# Altium PCB BMS.PcbDoc (part 1 of 3)
Units mm, origin at the board's own origin, x right, y up, seen from the top; angles counter-clockwise.
Board outline 84 x 70 mm, 4 copper layers (PWR, GND1, GND2, SIG), stack 1.586 mm thick; 200 components, 151 nets, 637 pads, 135 vias.
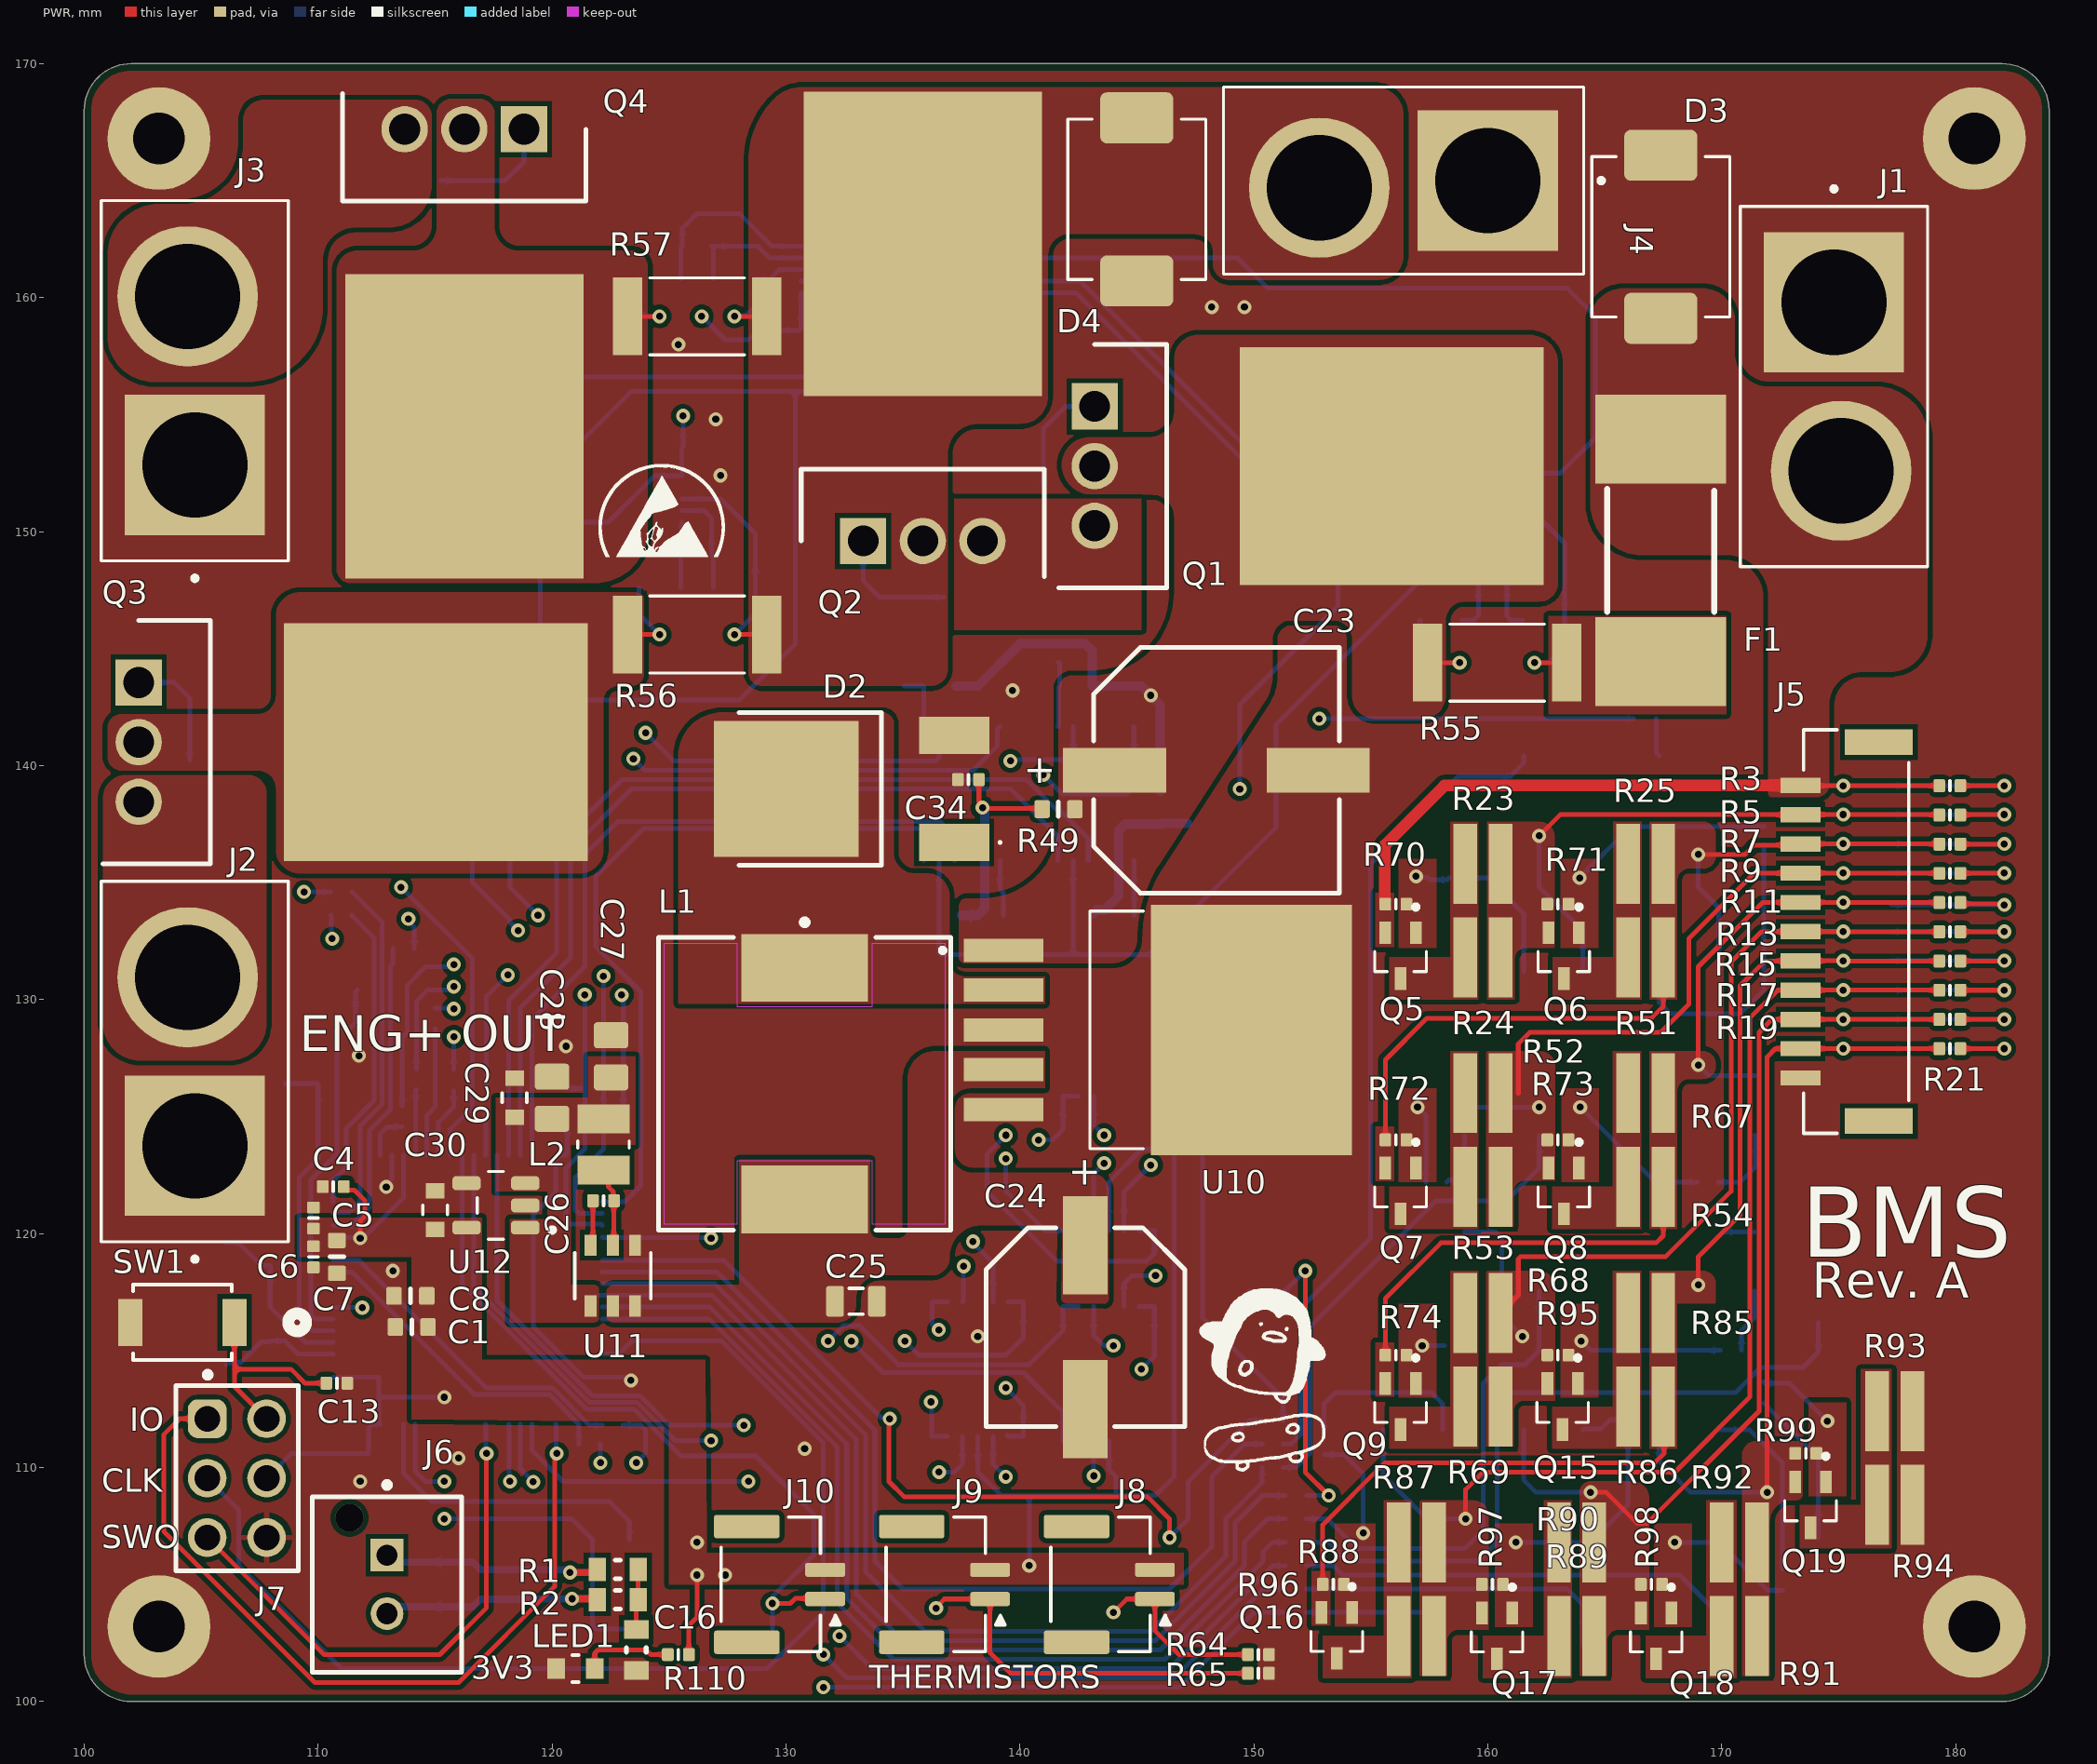
[diagram p0: PWR view]
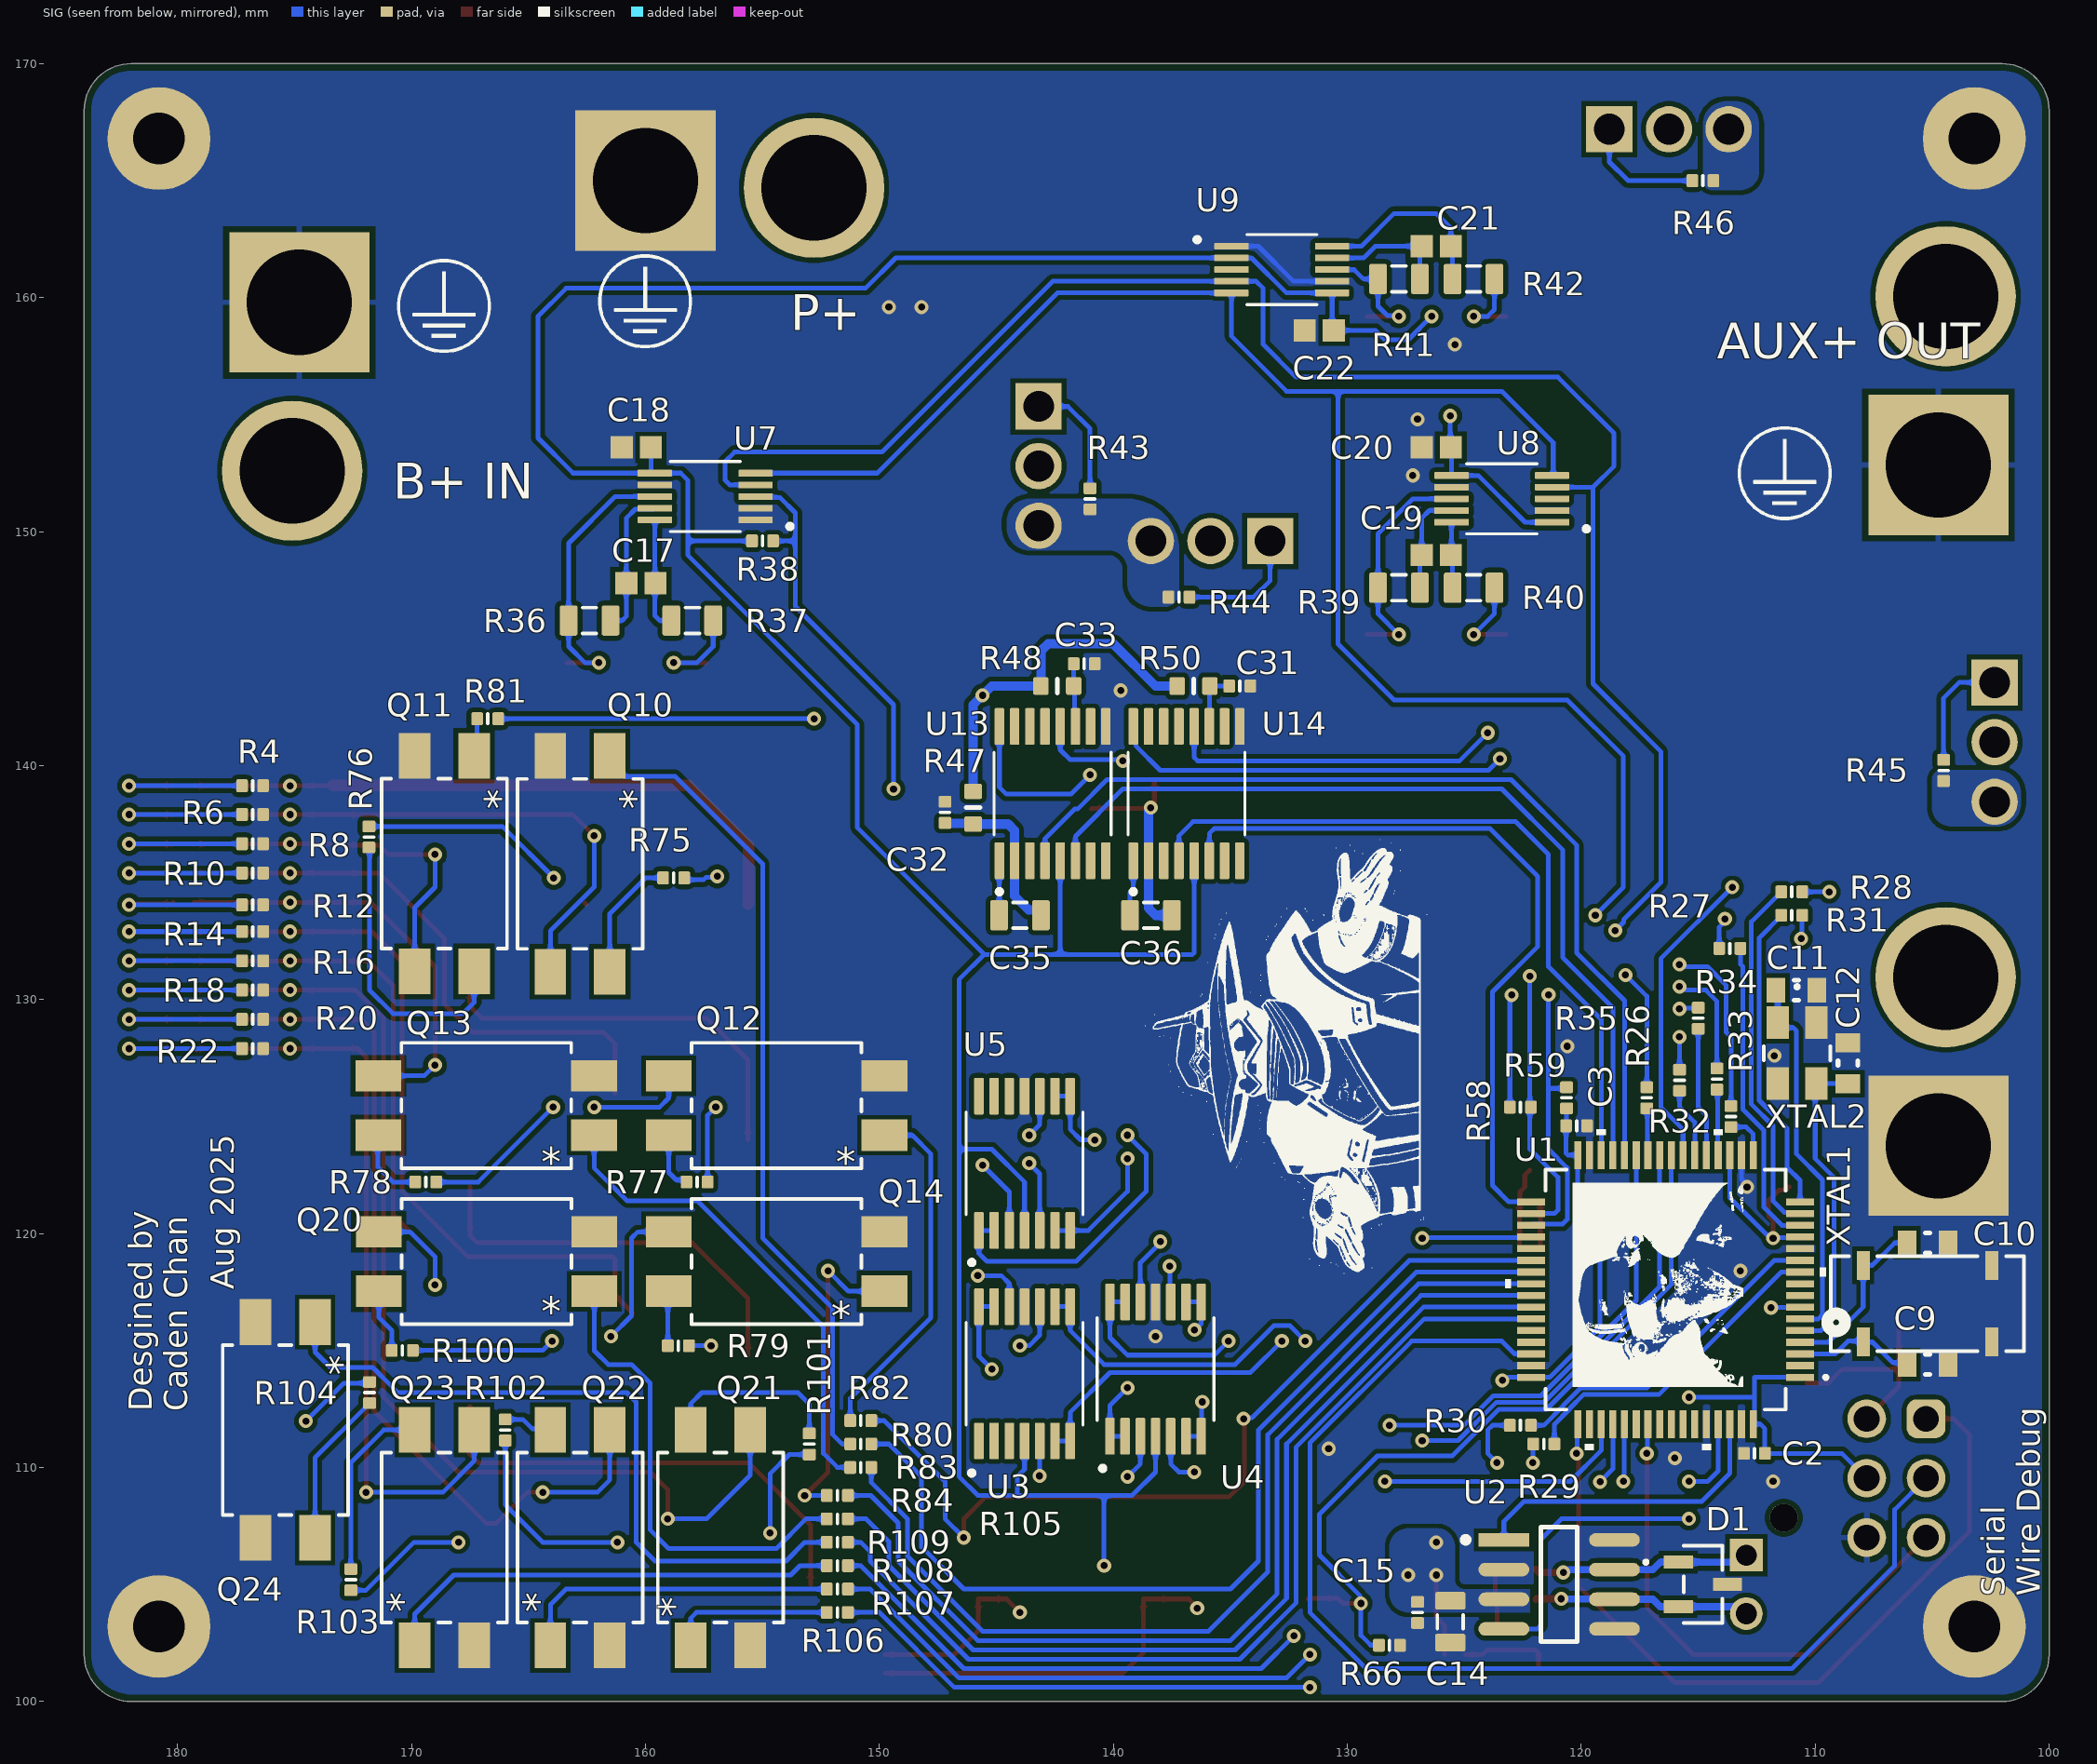
[diagram p1: SIG view, seen from below]
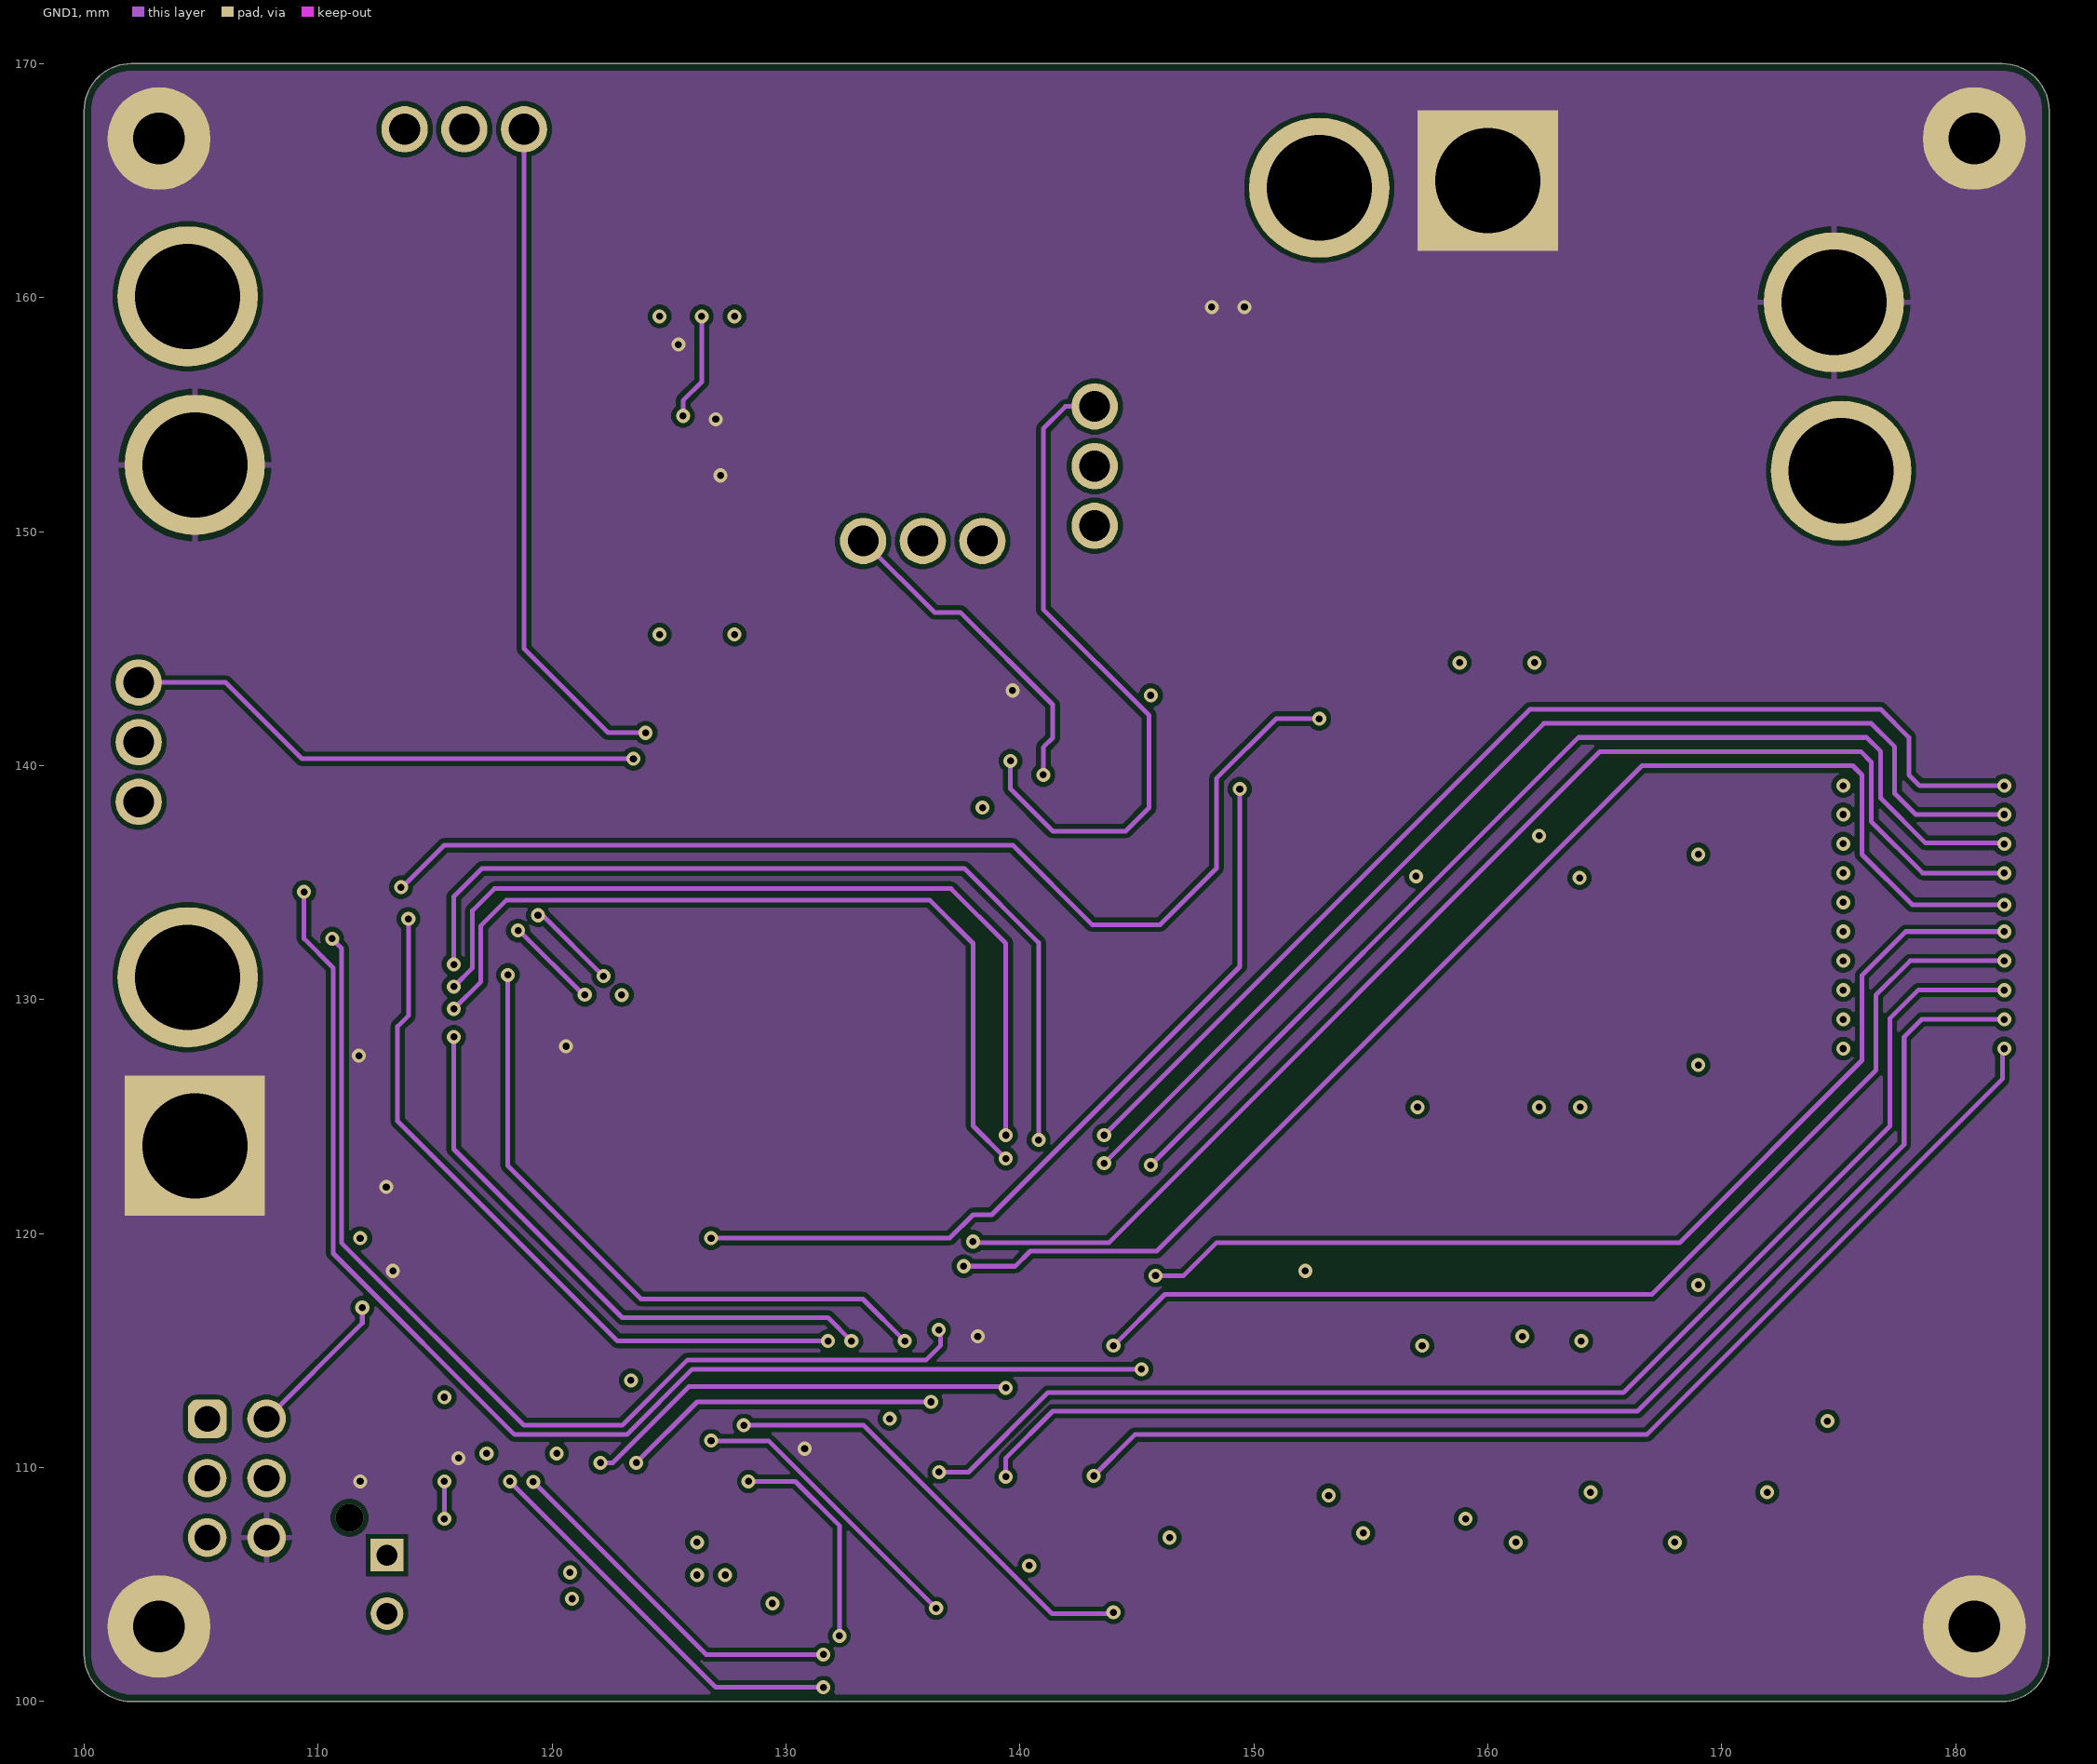
[diagram p2: GND1]
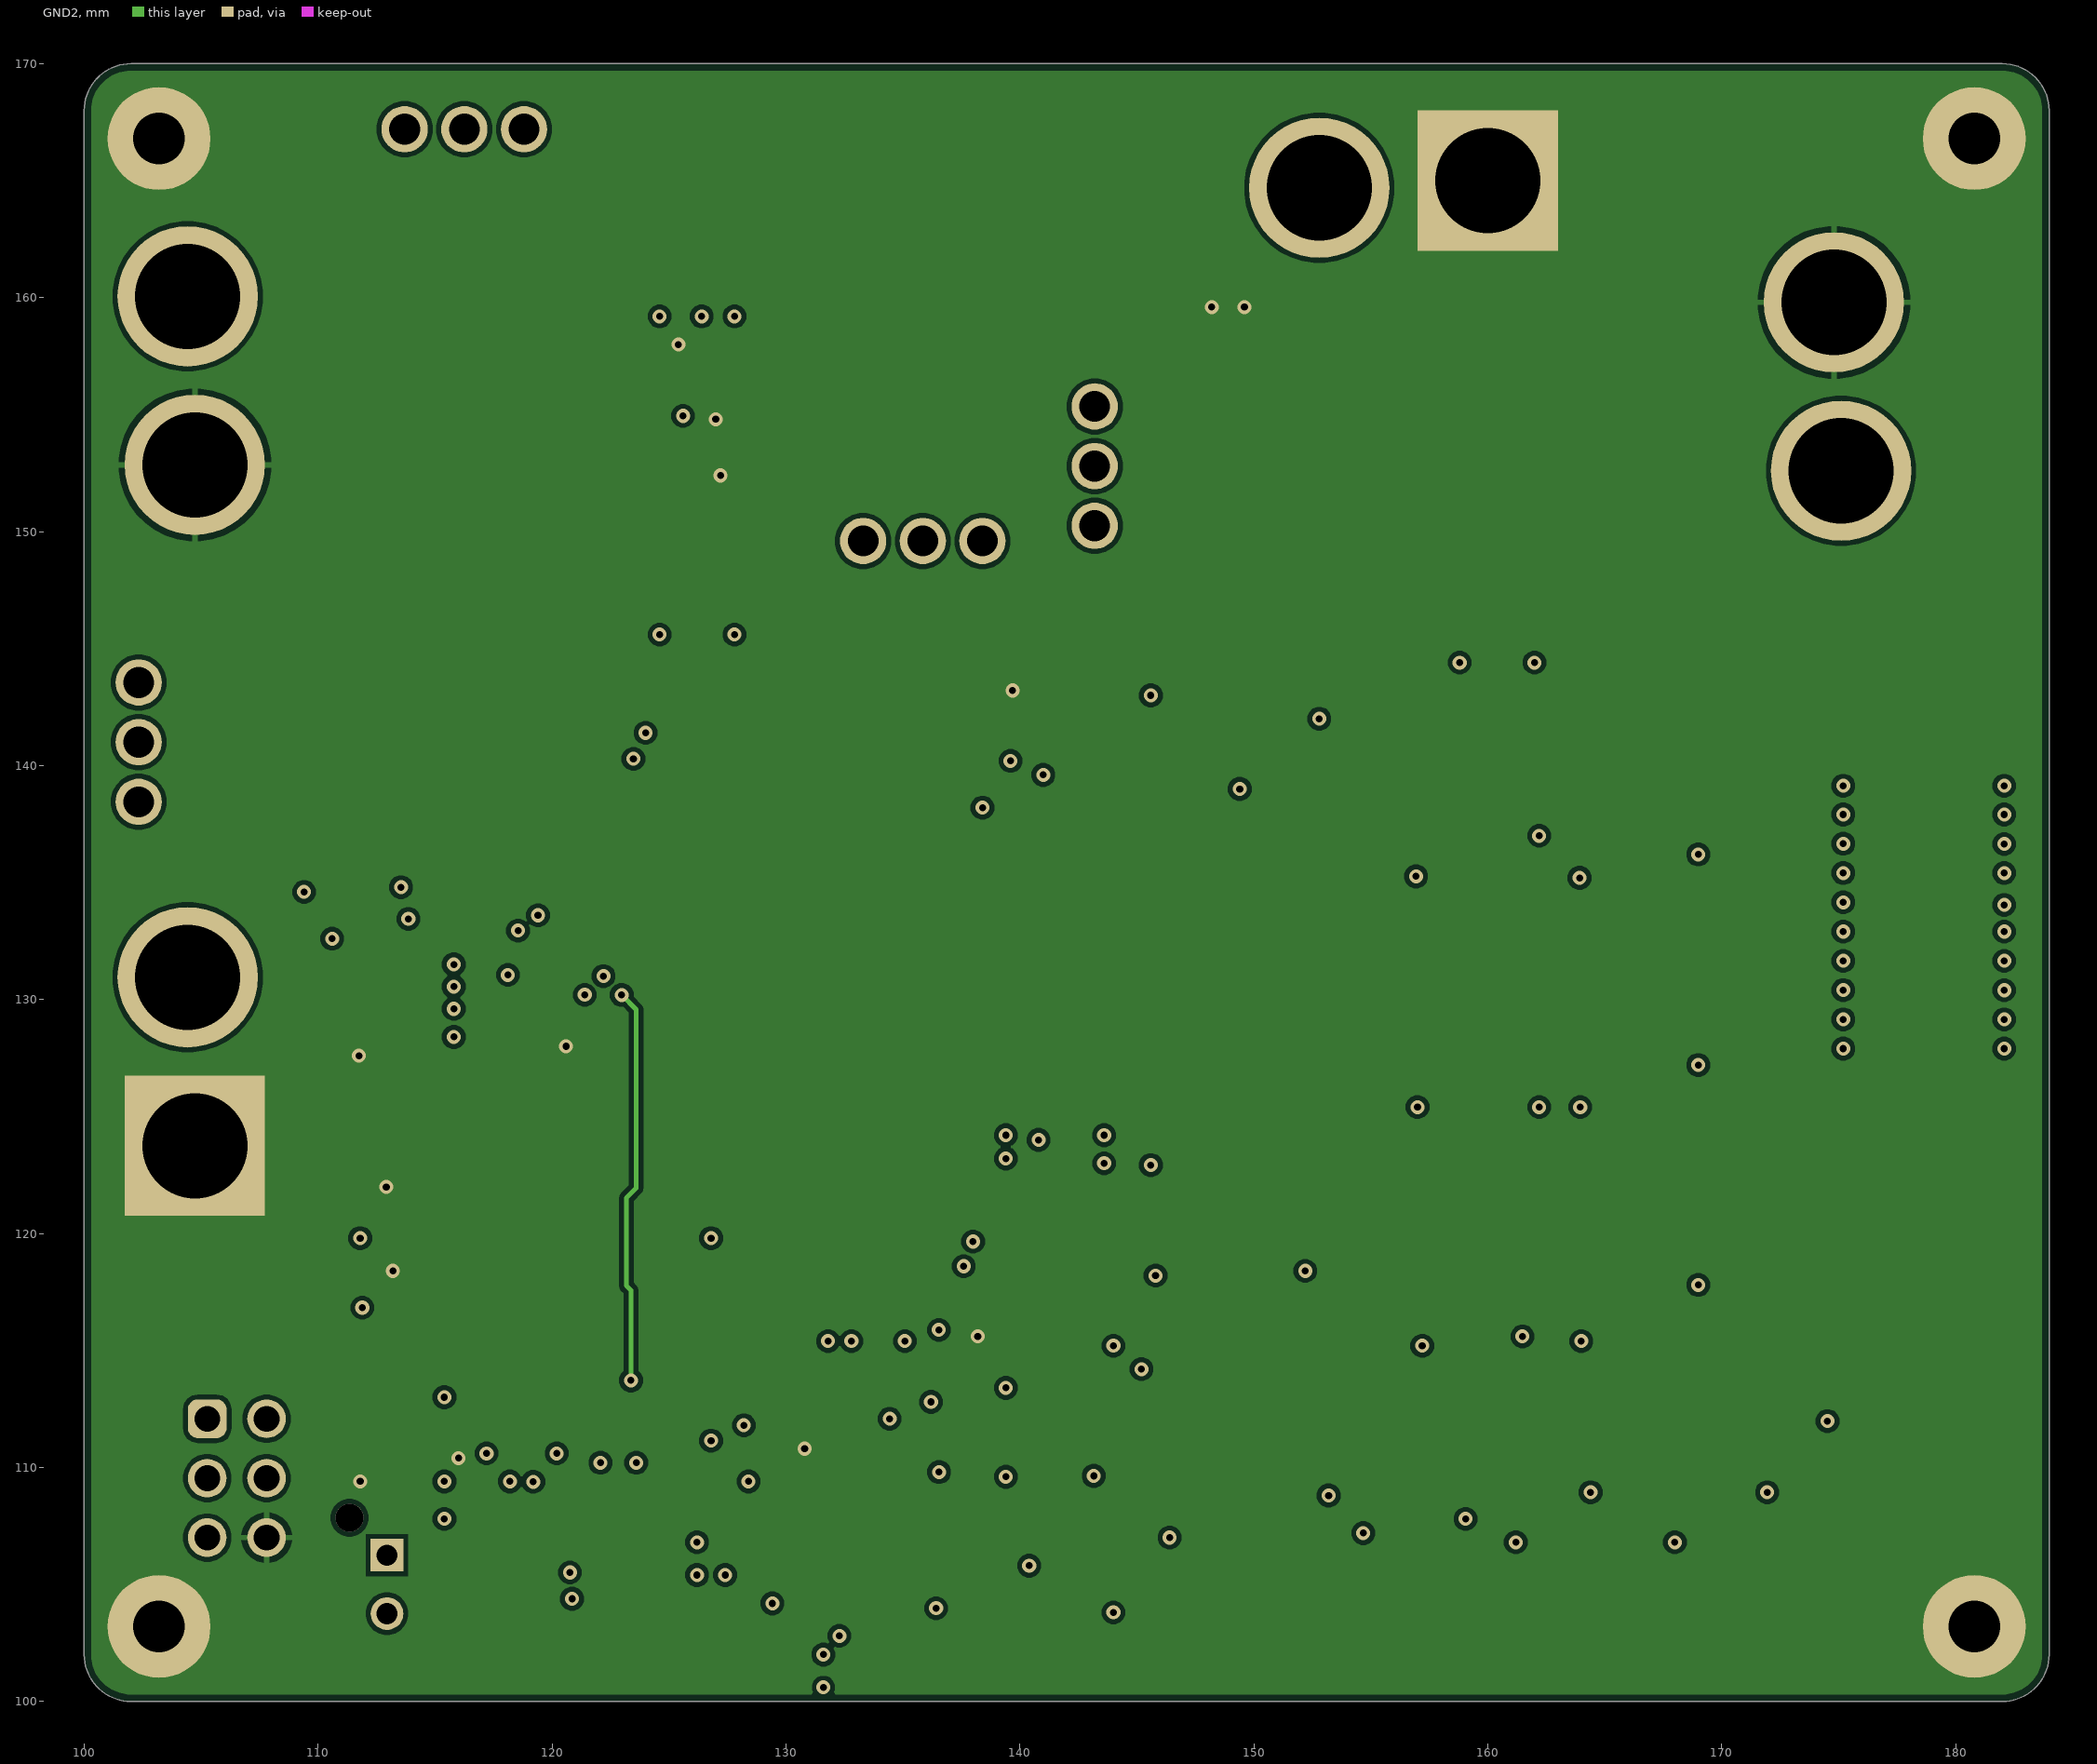
[diagram p3: GND2]

## Layer stack, top to bottom
Top Solder: solder mask 0.0102, Solder Resist, Dk 3.5
PWR: signal copper 0.035
Dielectric 2: prepreg 0.2104, PP-022, Dk 4.5
GND1: signal copper 0.0152
Dielectric 1: dielectric 1.065, FR-4, Dk 4.8
GND2: signal copper 0.0152
Dielectric 3: prepreg 0.2104, PP-022, Dk 4.5
SIG: signal copper 0.035
Bottom Solder: solder mask 0.0102, Solder Resist, Dk 3.5

## Board outline
102,100 cw(c102,102) 100,102 100,168 cw(c102,168) 102,170 182,170 cw(c182,168) 184,168 184,102 cw(c182,102) 182,100

## Design rules (kind name [scope] priority, off if disabled: settings)
BoardOutlineClearance [All] p1: gap=0.3 ignorepadtopadclearanceinfootprint=FALSE except(0.4: Arc-SplitBarrior Arc-SplitContinuation Track-SplitBarrior Track-SplitContinuation SMDPad-SplitBarrior SMDPad-SplitContinuation THPad-SplitBarrior THPad-SplitContinuation Via-SplitBarrior Via-SplitContinuation Fill-SplitBarrior Fill-SplitContinuation Poly-SplitBarrior Poly-SplitContinuation Region-SplitBarrior Region-SplitContinuation Text-SplitBarrior Text-SplitContinuation)
Clearance "Clearance Different Nets" [All] p1: gap=0.2 ignorepadtopadclearanceinfootprint=FALSE except(0.089: Arc-Arc Arc-Track Arc-SMDPad Track-Track Track-SMDPad; 0.127: SMDPad-SMDPad SMDPad-Via THPad-Via Via-Via; 0.254: Arc-Via Arc-Text Track-Via Track-Text SMDPad-Text THPad-Text Via-Text Fill-Text Poly-Text Region-Text Text-Text; 0.5: THPad-THPad Via-Hole)
Clearance "Clearance Same Nets" [All] p2: gap=0.2 ignorepadtopadclearanceinfootprint=FALSE except(0.089: Arc-Arc Arc-Track Arc-SMDPad Track-Track Track-SMDPad SMDPad-SMDPad; 0.127: SMDPad-Via THPad-Via; 0.254: Arc-Via Arc-Text Track-Via Track-Text SMDPad-Text THPad-Text Via-Via Via-Text Fill-Text Poly-Text Region-Text Text-Text)
Clearance "Clearance Bottom Layer" [OnLayer('Bottom Layer')] p3: gap=0.203 ignorepadtopadclearanceinfootprint=TRUE except(0.254: Arc-Text Track-Text SMDPad-Text THPad-Text Via-Text Fill-Text Poly-Text Region-Text Text-Text)
Clearance "Clearance Top Layer" [OnLayer('Top Layer')] p4: gap=0.203 ignorepadtopadclearanceinfootprint=TRUE except(0.254: Arc-Text Track-Text SMDPad-Text THPad-Text Via-Text Fill-Text Poly-Text Region-Text Text-Text)
DiffPairsRouting [All] p1: maxlimit=0.762 minlimit=0.15 mostfreqgap=0.508 toplayer_minwidth=0 toplayer_maxwidth=0.762 toplayer_prefwidth=0.305 midlayer1_minwidth=0 midlayer1_maxwidth=0.762 midlayer1_prefwidth=0.305 midlayer2_minwidth=0 midlayer2_maxwidth=0.762 midlayer2_prefwidth=0.305 bottomlayer_minwidth=0 bottomlayer_maxwidth=0.762 bottomlayer_prefwidth=0.305 maxuncoupledlength=12.7
HoleSize [All] p1: absolutevalues=TRUE maxlimit=6.3 minlimit=0.3 maxpercent=80.000 minpercent=20.000
HoleToHoleClearance [All] p1: gap=0.25 allowstackedmicrovias=TRUE
MinimumAnnularRing [All] p1: minimumring=0.13
MinimumSolderMaskSliver [All] p1: minsoldermaskwidth=0
PlaneClearance [All] p1: clearance=0.5
PlaneConnect PlaneConnect_1 [All] p1: planeconnectstyle=Relief reliefexpansion=0.508 reliefentries=4 reliefconductorwidth=0.254 reliefairgap=0.254
PolygonConnect [All] p1: thpad.connectstyle=Relief thpad.reliefconductorwidth=0.254 thpad.reliefentries=4 thpad.polygonreliefangle="90 Angle" thpad.airgapwidth=0.254 smdpad.connectstyle=Direct smdpad.reliefconductorwidth=0.254 smdpad.reliefentries=4 smdpad.polygonreliefangle="90 Angle" smdpad.airgapwidth=0.254 via.connectstyle=Direct via.reliefconductorwidth=0.254 via.reliefentries=4 via.polygonreliefangle="90 Angle" via.airgapwidth=0.254
RoutingCorners [All] p1: cornerstyle=Round minsetback=2.54 maxsetback=2.54
RoutingVias [All] p1: holewidth=0.3 width=0.6 viastyle="Through Hole" minholewidth=0.1 minwidth=0.5 maxholewidth=1 maxwidth=2
SilkToSilkClearance [All] p1: silktosilkclearance=0.1
SilkToSolderMaskClearance [IsPad] p1: minsilkscreentomaskgap=0.1 clearancetoexposedcopper=TRUE
SolderMaskExpansion [All] p1: expansion=0.102 istentingtop=FALSE
SupplyNets "Schematic Supply Nets_12" [InNet('AUX+')] p1: voltage=0.000
SupplyNets "Schematic Supply Nets_11" [InNet('BMS5V')] p2: voltage=0.000
SupplyNets "Schematic Supply Nets_10" [InNet('B+')] p3: voltage=0.000
SupplyNets "Schematic Supply Nets_9" [InNet('BMS12V')] p4: voltage=0.000
SupplyNets "Schematic Supply Nets_8" [InNet('ENGINE+')] p5: voltage=0.000
SupplyNets "Schematic Supply Nets_7" [InNet('BMS+')] p6: voltage=0.000
SupplyNets "Schematic Supply Nets_6" [InNet('P+')] p7: voltage=0.000
SupplyNets "Schematic Supply Nets_5" [InNet('BMS3.3V')] p8: voltage=0.000
SupplyNets "Schematic Supply Nets_4" [InNet('B+_FUSED')] p9: voltage=0.000
SupplyNets "Schematic Supply Nets_1" [InNet('GND')] p10: voltage=0.000
Width [All] p1: maxlimit=2.54 minlimit=0.089 preferedwidth=0.2
21 further rules are at their usual default settings.

## Classes and differential pairs
component class BMS_Balancing: Q5 Q6 Q7 Q8 Q9 Q10 Q11 Q12 Q13 Q14 Q15 Q16 Q17 Q18 Q19 Q20 Q21 Q22 Q23 Q24 R23 R24 R25 R51 R52 R53 R54 R67 R68 R69 R70 R71 R72 R73 R74 R75 R76 R77 R78 R79 R80 R81 R82 R83 R84 R85 R86 R87 R88 R89 R90 R91 R92 R93 R94 R95 R96 R97 R98 R99 R100 R101 R102 R103 R104 R105 R106 R107 R108 R109
component class BMS_Protection: C31 C32 C33 C34 C35 C36 F1 Q1 Q2 Q3 Q4 R43 R44 R45 R46 R47 R48 R49 R50 U13 U14
component class BMS_PowerRegulation: C23 C24 C25 C26 C27 C28 C29 C30 D2 L1 L2 LED1 R110 U10 U11 U12
component class BMS_STM32: C1 C2 C3 C4 C5 C6 C7 C8 C9 C10 C11 C12 C13 C14 C15 C16 D1 R1 R2 R58 R59 SW1 U1 U2 XTAL1 XTAL2
component class BMS_Logic: C17 C18 C19 C20 C21 C22 R3 R4 R5 R6 R7 R8 R9 R10 R11 R12 R13 R14 R15 R16 R17 R18 R19 R20 R21 R22 R26 R27 R28 R29 R30 R31 R32 R33 R34 R35 R36 R37 R38 R39 R40 R41 R42 R55 R56 R57 U3 U4 U5 U7 U8 U9
component class BMS_Connectors: D3 D4 J1 J2 J3 J4 J5 J6 J7 J8 J9 J10 R64 R65 R66
differential pair CAN: +CAN_H -CAN_L

## Components (designator, comment, footprint, x,y, rotation, side; value= is the part's Value field where it differs from the comment)
C1 "Capacitor 4.7µF +/-20% 10V 0603" CAPC0603(1608)100_L 114,116 r180 top value=4.7µF
C2 "Capacitor 100nF +/-20% 50V 0402" CAPC0402(1005)60_L 112.6,110.6 r180 bottom value=100nF
C3 "Capacitor 100nF +/-20% 50V 0402" CAPC0402(1005)60_L 120.2,124.6 r0 bottom value=100nF
C4 "Capacitor 100nF +/-20% 50V 0402" CAPC0402(1005)60_L 110.65,122 r0 top value=100nF
C5 "Capacitor 100nF +/-20% 50V 0402" CAPC0402(1005)60_L 109.8,120.654 r270 top value=100nF
C6 "Capacitor 10nF +/-20% 50V 0402" CAPC0402(1005)60_L 109.8,119 r270 top value=10nF
C7 "Capacitor 1µF +/-40% 50V 0603" CAPC0603(1608)100_L 110.8,119 r270 top value=1µF
C8 "Capacitor 1µF +/-40% 50V 0603" CAPC0603(1608)100_L 113.946,117.33 r180 top value=1µF
C9 "Yageo CC0603CRNPO9BN6R0" CAPC1709X04N 105.2,114.4 r180 bottom value=6pF
C10 "Yageo CC0603CRNPO9BN6R0" CAPC1709X04N 105.2,119.6 r180 bottom value=6pF
C11 "Yageo CC0603JRNPO9BN160" CAPC1709X04N 110.8,130.4 r180 bottom value=16pF
C12 "Yageo CC0603JRNPO9BN160" CAPC1709X04N 108.6,127.275 r270 bottom value=16pF
C13 "Capacitor 100nF +/-20% 50V 0402" CAPC0402(1005)60_L 110.8,113.6 r180 top value=100nF
C14 "Samsung Electro-Mechanics CL21A106KBYQNNE" CAPC0805(2012)145_L 125.6,103.4 r270 bottom value=10µF
C15 "Capacitor 100nF +/-20% 50V 0402" CAPC0402(1005)60_L 127,103.8 r270 bottom value=100nF
C16 "yageo CC0603KRX7R9BB472" CAPC1709X04N 123.6,102.2 r270 top value=4.7nF
C17 "CC0603KRX7R0BB104" CAPC1608X90X40NL10T20 160.2,147.8 r0 bottom value=100nF
C18 "CC0603KRX7R0BB104" CAPC1608X90X40NL10T20 160.4,153.6 r180 bottom value=100nF
C19 "CC0603KRX7R0BB104" CAPC1608X90X40NL10T20 126.2,149 r0 bottom value=100nF
C20 "CC0603KRX7R0BB104" CAPC1608X90X40NL10T20 126.2,153.6 r180 bottom value=100nF
C21 "CC0603KRX7R0BB104" CAPC1608X90X40NL10T20 126.2,162.2 r0 bottom value=100nF
C22 "CC0603KRX7R0BB104" CAPC1608X90X40NL10T20 131.2,158.6 r180 bottom value=100nF
C23 "865080757014" WCAP-ASLI_D10H10.5 148.4,139.8 r180 top value=100µF
C24 "865080553014" WCAP-ASLI_D8H10.5 142.8,116 r90 top value=220µF
C25 "Samsung Electro-Mechanics CL21A106KBYQNNE" CAPC0805(2012)145_L 133,117.1 r0 top value=10µF
C26 "Capacitor 100nF +/-20% 50V 0402" CAPC0402(1005)60_L 122.2,121.4 r180 top value=100nF
C27 "CL21A226MAYNNNE" CAPC2012X145N 122.524,127.571 r270 top value=22µF
C28 "CL21A226MAYNNNE" CAPC2012X145N 120,125.8 r270 top value=22µF
C29 "CL10B105KP8NNNC" CAP_CL10_SAM 118.4,125.8 r270 top value=1µF
C30 "CL10B105KP8NNNC" CAP_CL10_SAM 115,121 r270 top value=1µF
C31 "CC0603KRX7R0BB103" CAPC0402(1005)60_L 134.6,143.4 r0 bottom value=10nF
C32 "CC0603KRX7R0BB103" CAPC0402(1005)60_L 147.2,138 r270 bottom value=10nF
C33 "CC0603KRX7R0BB103" CAPC0402(1005)60_L 141.25,144.35 r0 bottom value=10nF
C34 "CC0603KRX7R0BB103" CAPC0402(1005)60_L 137.8,139.4 r0 top value=10nF
C35 "CC0805KKX7R0BB474" CAPC0805(2012)145_L 144,133.6 r0 bottom value=470nF
C36 "CC0805KKX7R0BB474" CAPC0805(2012)145_L 138.4,133.6 r0 bottom value=470nF
D1 "SM24CANB-02HTG" SOT23-3_SM24CANB-02HTG_LTF 114.8,105 r270 bottom
D2 "MBRD660CTT4G" MBRD660CTT4G 132.8,139 r90 top
D3 "5.0SMDJ45A" DIOM7959X262N 167.4,162.6 r90 top
D4 "5.0SMDJ45A" DIOM7959X262N 145,164.2 r270 top
F1 "JFC1245-2800FS 80A Fuse" FUSE-SMD_L12.5-W4.5 167.4,149.2 r270 top
J1 "XT60" AMASS_XT60PB-M#1 174.8,156.2 r270 top
J2 "XT60" AMASS_XT60PB-M#2 104.73,127.35 r90 top
J3 "XT60" AMASS_XT60PB-M#1 104.73,156.454 r90 top
J4 "XT60" AMASS_XT60PB-M#2 156.4,165 r180 top
J5 "BM11B-GHS-TBTLFSNN" CONN11_BM11B-GHS-TBTLFSNN_JST 175.75,132.9 r270 top
J6 "JST-B02B-XASK-1-A" FP-B02B-XASK-1-A_LF_SN-MFG 112.946,105 r90 top
J7 "61300621121" 61300621121 106.53,109.54 r270 top
J8 "BM02B-GHS-TBT(LF)(SN)(N)" JST-BM02B-GHS-TBT_V 144.1,105 r90 top
J9 "BM02B-GHS-TBT(LF)(SN)(N)" JST-BM02B-GHS-TBT_V 137.052,105 r90 top
J10 "BM02B-GHS-TBT(LF)(SN)(N)" JST-BM02B-GHS-TBT_V 130.003,105 r90 top
L1 "7447709821 820uH" WE-PD_1210 130.8,126.4 r180 top
L2 "LQM2HPN4R7MG0L" INDC2520X100N 122.2,123.8 r90 top value=4.7µH
LED1 "LTST-C193KGKT-5A" LED_LTST-C194K-0603_1P6X0P8X0P3_LTO 121,101.4 r0 top
Q1 "STP100N8F6" TO255P460X1020X2008-3P 143.2,155.35 r270 top
Q2 "STP100N8F6" TO255P460X1020X2008-3P 133.3,149.6 r0 top
Q3 "STP100N8F6" TO255P460X1020X2008-3P 102.33,143.55 r270 top
Q4 "STP100N8F6" TO255P460X1020X2008-3P 118.8,167.2 r180 top
Q5 "DMP2240UW-7" SOT65P210X110-3N 156.275,131.875 r270 top
Q6 "DMP2240UW-7" SOT65P210X110-3N 163.25,131.875 r270 top
Q7 "DMP2240UW-7" SOT65P210X110-3N 156.275,121.82 r270 top
Q8 "DMP2240UW-7" SOT65P210X110-3N 163.25,121.82 r270 top
Q9 "DMP2240UW-7" SOT65P210X110-3N 156.275,112.6 r270 top
Q10 "LTV-817S-TA1" LTV-817S_LTO 162.8,135.8 r270 bottom
Q11 "LTV-817S-TA1" LTV-817S_LTO 168.6,135.81 r270 bottom
Q12 "LTV-817S-TA1" LTV-817S_LTO 154.4,125.47 r0 bottom
Q13 "LTV-817S-TA1" LTV-817S_LTO 166.81,125.47 r0 bottom
Q14 "LTV-817S-TA1" LTV-817S_LTO 154.4,118.8 r0 bottom
Q15 "DMP2240UW-7" SOT65P210X110-3N 163.2,112.6 r270 top
Q16 "DMP2240UW-7" SOT65P210X110-3N 153.55,102.82 r270 top
Q17 "DMP2240UW-7" SOT65P210X110-3N 160.4,102.8 r270 top
Q18 "DMP2240UW-7" SOT65P210X110-3N 167.2,102.8 r270 top
Q19 "DMP2240UW-7" SOT65P210X110-3N 173.8,108.4 r270 top
Q20 "LTV-817S-TA1" LTV-817S_LTO 166.8,118.8 r0 bottom
Q21 "LTV-817S-TA1" LTV-817S_LTO 156.8,107 r90 bottom
Q22 "LTV-817S-TA1" LTV-817S_LTO 162.8,107 r90 bottom
Q23 "LTV-817S-TA1" LTV-817S_LTO 168.6,107 r90 bottom
Q24 "LTV-817S-TA1" LTV-817S_LTO 175.4,111.6 r270 bottom
R1 "yageo RC0603FR-0760R4L" RESC1709X04N 122.811,105.641 r180 top value=60.4
R2 "yageo RC0603FR-0760R4L" RESC1709X04N 122.811,104.352 r0 top value=60.4
R3 "RC0402FR-07130KL" RESC0402(1005)_L 179.755,139.138 r180 top value=130k
R4 "RC0402FR-0710KL" RESC0402(1005)_L 176.8,139.138 r0 bottom value=10k
R5 "RC0402FR-07130KL" RESC0402(1005)_L 179.755,137.889 r180 top value=130k
R6 "RC0402FR-0710KL" RESC0402(1005)_L 176.8,137.908 r0 bottom value=10k
R7 "RC0402FR-07130KL" RESC0402(1005)_L 179.755,136.64 r180 top value=130k
R8 "RC0402FR-0710KL" RESC0402(1005)_L 176.8,136.657 r0 bottom value=10k
R9 "RC0402FR-07130KL" RESC0402(1005)_L 179.755,135.392 r180 top value=130k
R10 "RC0402FR-0710KL" RESC0402(1005)_L 176.8,135.406 r0 bottom value=10k
R11 "RC0402FR-07130KL" RESC0402(1005)_L 179.755,134.143 r180 top value=130k
R12 "RC0402FR-0710KL" RESC0402(1005)_L 176.8,134.044 r0 bottom value=10k
R13 "RC0402FR-07130KL" RESC0402(1005)_L 179.755,132.895 r180 top value=130k
R14 "RC0402FR-0710KL" RESC0402(1005)_L 176.8,132.904 r0 bottom value=10k
R15 "RC0402FR-07130KL" RESC0402(1005)_L 179.755,131.646 r180 top value=130k
R16 "RC0402FR-0710KL" RESC0402(1005)_L 176.8,131.653 r0 bottom value=10k
R17 "RC0402FR-07130KL" RESC0402(1005)_L 179.755,130.397 r180 top value=130k
R18 "RC0402FR-0710KL" RESC0402(1005)_L 176.8,130.402 r0 bottom value=10k
R19 "RC0402FR-07130KL" RESC0402(1005)_L 179.755,129.151 r180 top value=130k
R20 "RC0402FR-0710KL" RESC0402(1005)_L 176.8,129.151 r0 bottom value=10k
R21 "RC0402FR-07130KL" RESC0402(1005)_L 179.755,127.9 r180 top value=130k
R22 "RC0402FR-0710KL" RESC0402(1005)_L 176.8,127.9 r0 bottom value=10k
R23 "YAGEO AC0612FR-0733RL" RESC1632X70N 159.8,135.8 r180 top value=33R
R24 "YAGEO AC0612FR-0733RL" RESC1632X70N 159.8,131.8 r180 top value=33R
R25 "YAGEO AC0612FR-0733RL" RESC1632X70N 166.753,135.8 r180 top value=33R
R26 "RC0402FR-07100RL" RESC0402(1005)_L 117.2,125.8 r270 bottom value=100R
R27 "RC0402FR-07100RL" RESC0402(1005)_L 113.65,132.183 r180 bottom value=100R
R28 "RC0402FR-07100RL" RESC0402(1005)_L 111,134.6 r0 bottom value=100R
R29 "RC0402FR-07100RL" RESC0402(1005)_L 121.6,111 r180 bottom value=100R
R30 "RC0402FR-07100RL" RESC0402(1005)_L 122.6,111.8 r180 bottom value=100R
R31 "RC0402FR-07100RL" RESC0402(1005)_L 111,133.6 r0 bottom value=100R
R32 "RC0402FR-07100RL" RESC0402(1005)_L 113.6,125 r270 bottom value=100R
R33 "RC0402FR-07100RL" RESC0402(1005)_L 114.2,126.6 r270 bottom value=100R
R34 "RC0402FR-07100RL" RESC0402(1005)_L 115,129.2 r270 bottom value=100R
R35 "RC0402FR-07100RL" RESC0402(1005)_L 115.8,126.55 r270 bottom value=100R
R36 "RC0805FR-071RL" RESC0805(2012)_L 162.4,146.2 r0 bottom value=1R
R37 "RC0805FR-071RL" RESC0805(2012)_L 158,146.2 r180 bottom value=1R
R38 "ERJ2GEJ103X" RESC0402(1005)_L 155,149.6 r0 bottom value=10k
R39 "RC0805FR-071RL" RESC0805(2012)_L 127.8,147.6 r0 bottom value=1R
R40 "RC0805FR-071RL" RESC0805(2012)_L 124.6,147.6 r180 bottom value=1R
R41 "RC0805FR-071RL" RESC0805(2012)_L 127.8,160.8 r0 bottom value=1R
R42 "RC0805FR-071RL" RESC0805(2012)_L 124.6,160.8 r180 bottom value=1R
R43 "RC0402FR-0710ML" RESC0402(1005)_L 141,151.4 r270 bottom value=10M
R44 "RC0402FR-0710ML" RESC0402(1005)_L 137.2,147.2 r0 bottom value=10M
R45 "RC0402FR-0710ML" RESC0402(1005)_L 104.51,139.79 r270 bottom value=10M
R46 "RC0402FR-0710ML" RESC0402(1005)_L 114.8,165 r180 bottom value=10M
R47 "RC0603FR-07100RL" RESC0603(1608)_L 146,138.2 r270 bottom value=100R
R48 "RC0603FR-07100RL" RESC0603(1608)_L 142.4,143.4 r180 bottom value=100R
R49 "RC0603FR-07100RL" RESC0603(1608)_L 141.65,138.138 r180 top value=100R
R50 "RC0603FR-07100RL" RESC0603(1608)_L 136.575,143.4 r180 bottom value=100R
R51 "YAGEO AC0612FR-0733RL" RESC1632X70N 166.753,131.8 r180 top value=33R
R52 "YAGEO AC0612FR-0733RL" RESC1632X70N 159.8,126 r180 top value=33R
R53 "YAGEO AC0612FR-0733RL" RESC1632X70N 159.8,122 r180 top value=33R
R54 "YAGEO AC0612FR-0733RL" RESC1632X70N 166.753,122 r180 top value=33R
R55 "HoSRX2512-3W-0.6m-0.5%" RESC6331X75N 160.4,144.4 r180 top value=0.6m
R56 "Milliohm HoJLR2512-3W-1mR-1%" RESC6331X75N 126.2,145.6 r180 top value=1m
R57 "Milliohm HoJLR2512-3W-4mR-1%" RESC6331X75N 126.2,159.2 r180 top value=4m
R58 "RC0402FR-0710KL" RESC0402(1005)_L 122.6,125.4 r0 bottom value=10k
R59 "RC0402FR-0710KL" RESC0402(1005)_L 120.63,125.8 r270 bottom value=10k
R64 "RC0402FR-0710KL" RESC0402(1005)_L 150.2,102 r0 top value=10k
R65 "RC0402FR-0710KL" RESC0402(1005)_L 150.2,101.2 r0 top value=10k
R66 "RC0402FR-0710KL" RESC0402(1005)_L 128.2,102.4 r180 bottom value=10k
R67 "YAGEO AC0612FR-0733RL" RESC1632X70N 166.753,126 r180 top value=33R
R68 "YAGEO AC0612FR-0733RL" RESC1632X70N 159.8,116.6 r180 top value=33R
R69 "YAGEO AC0612FR-0733RL" RESC1632X70N 159.8,112.6 r180 top value=33R
R70 "CRCW0402100KJNED" RESC0402(1005)_L 156.075,134.075 r0 top value=100k
R71 "CRCW0402100KJNED" RESC0402(1005)_L 163,134.075 r0 top value=100k
R72 "CRCW0402100KJNED" RESC0402(1005)_L 156.075,124 r0 top value=100k
R73 "CRCW0402100KJNED" RESC0402(1005)_L 163,124 r0 top value=100k
R74 "CRCW0402100KJNED" RESC0402(1005)_L 156.075,114.8 r0 top value=100k
R75 "CL0402FN10RP" RESC0402(1005)_L 158.8,135.2 r180 bottom value=10
R76 "CL0402FN10RP" RESC0402(1005)_L 171.828,136.947 r90 bottom value=10
R77 "CL0402FN10RP" RESC0402(1005)_L 157.8,122.2 r180 bottom value=10
R78 "CL0402FN10RP" RESC0402(1005)_L 169.4,122.2 r180 bottom value=10
R79 "CL0402FN10RP" RESC0402(1005)_L 158.6,115.2 r180 bottom value=10
R80 "CR0402FF4020G" RESC0402(1005)_L 150.8,111 r180 bottom value=402R
R81 "CR0402FF4020G" RESC0402(1005)_L 166.75,142 r180 bottom value=402R
R82 "CR0402FF4020G" RESC0402(1005)_L 150.8,112 r180 bottom value=402R
R83 "CR0402FF4020G" RESC0402(1005)_L 150.8,110 r180 bottom value=402R
R84 "CR0402FF4020G" RESC0402(1005)_L 151.8,108.8 r180 bottom value=402R
R85 "YAGEO AC0612FR-0733RL" RESC1632X70N 166.753,116.6 r180 top value=33R
R86 "YAGEO AC0612FR-0733RL" RESC1632X70N 166.753,112.6 r180 top value=33R
R87 "YAGEO AC0612FR-0733RL" RESC1632X70N 156.953,106.8 r180 top value=33R
R88 "YAGEO AC0612FR-0733RL" RESC1632X70N 156.953,102.8 r180 top value=33R
R89 "YAGEO AC0612FR-0733RL" RESC1632X70N 163.8,102.8 r180 top value=33R
R90 "YAGEO AC0612FR-0733RL" RESC1632X70N 163.8,106.8 r180 top value=33R
R91 "YAGEO AC0612FR-0733RL" RESC1632X70N 170.753,102.8 r180 top value=33R
R92 "YAGEO AC0612FR-0733RL" RESC1632X70N 170.753,106.8 r180 top value=33R
R93 "YAGEO AC0612FR-0733RL" RESC1632X70N 177.4,112.4 r180 top value=33R
R94 "YAGEO AC0612FR-0733RL" RESC1632X70N 177.4,108.4 r180 top value=33R
R95 "CRCW0402100KJNED" RESC0402(1005)_L 163,114.8 r0 top value=100k
R96 "CRCW0402100KJNED" RESC0402(1005)_L 153.4,105 r0 top value=100k
R97 "CRCW0402100KJNED" RESC0402(1005)_L 160.2,105 r0 top value=100k
R98 "CRCW0402100KJNED" RESC0402(1005)_L 167,105 r0 top value=100k
R99 "CRCW0402100KJNED" RESC0402(1005)_L 173.6,110.6 r0 top value=100k
R100 "CL0402FN10RP" RESC0402(1005)_L 170.4,115 r180 bottom value=10
R101 "CL0402FN10RP" RESC0402(1005)_L 153,111 r270 bottom value=10
R102 "CL0402FN10RP" RESC0402(1005)_L 166,111.6 r270 bottom value=10
R103 "CL0402FN10RP" RESC0402(1005)_L 172.6,105.2 r270 bottom value=10
R104 "CL0402FN10RP" RESC0402(1005)_L 171.8,113.2 r90 bottom value=10
R105 "CR0402FF4020G" RESC0402(1005)_L 151.8,107.8 r180 bottom value=402R
R106 "CR0402FF4020G" RESC0402(1005)_L 151.8,103.8 r180 bottom value=402R
R107 "CR0402FF4020G" RESC0402(1005)_L 151.8,104.8 r180 bottom value=402R
R108 "CR0402FF4020G" RESC0402(1005)_L 151.8,105.8 r180 bottom value=402R
R109 "CR0402FF4020G" RESC0402(1005)_L 151.8,106.8 r180 bottom value=402R
R110 "RT0402BRD07267RL" RESC0402(1005)_L 125.4,102 r0 top value=267R
SW1 "TS-1088R-02026" SW_TS-1088R-02026_XNP 104.2,116.2 r180 top
U1 "STM32L475RCT6" LQFP64-10x10mm 116.4,117.6 r0 bottom
U2 "TCAN334GDR" FP-D0008A-IPC_B 120.946,105 r180 bottom
U3 "LMV324IPWR" SOP65P640X120-14N 143.8,114 r90 bottom
U4 "LMV324IPWR" SOP65P640X120-14N 138.2,114.2 r90 bottom
U5 "LMV324IPWR" SOP65P640X120-14N 143.8,123 r90 bottom
U7 "INA237AIDGSR" SOP50P490X110-10N 157.45,151.5 r0 bottom
U8 "INA237AIDGSR" SOP50P490X110-10N 123.4,151.4 r0 bottom
U9 "INA237AIDGSR" SOP50P490X110-10N 132.8,161.2 r180 bottom
U10 "TL2575HV-12IKTTR" VREG_TPS79625KTTR 149.9,128.7 r0 top
U11 "AP63205WU-7" SOIC_05WU-7_DIO 122.6,118.2 r90 top
U12 "TLV75733PDBVR" SOT95P280X145-5N 117.6,121.2 r180 top
U13 "BQ76200PWR" SOP65P640X120-16N 142.6,138.8 r90 bottom
U14 "BQ76200PWR" SOP65P640X120-16N 136.875,138.8 r90 bottom
XTAL1 "ECS-.327-6-17X-TR" XTAL_7X-TR_ECS 105.2,117 r90 bottom
XTAL2 "X322525MOB4SI" SMT_MOB4SI_YXC 110.775,127.705 r270 bottom

## Footprints (in the part's own frame and the unit in brackets; to place one, negate y for a bottom-side part, rotate by r counter-clockwise, add the part's x,y. Pads: shape width x height; smd on the part's side, far side on the other; paste and mask are expansions set on the pad)
61300621121 [mm] "Pin Header, pitch 2.54 mm, THT, Vertical, dual row, 6p"
  rrect50% 1.65x1.65 hole 1.1: 1(-2.54,-1.27)
  round 1.65 hole 1.1: 2(-2.54,1.27) 3(0,-1.27) 4(0,1.27) 5(2.54,-1.27) 6(2.54,1.27)
  silkscreen extent -4.54,-2.61 3.96,2.62, body extent -3.81,-2.54 3.81,2.54, height 8.59
AMASS_XT60PB-M#1 [mm]
  rect 6x6 / inner round 6 / far side rect 6x6 hole 4.5: 1(-3.6,0)
  round 6 hole 4.5: 2(3.6,0.305)
  silkscreen extent -8.55,-4 7.7,4, body extent -7.75,-4.05 7.75,4.05, height 16
AMASS_XT60PB-M#2 [mm]
  rect 6x6 hole 4.5: 1(-3.6,0)
  round 6 hole 4.5: 2(3.6,0.305)
  silkscreen extent -8.55,-4 7.7,4, body extent -7.75,-4.05 7.75,4.05, height 16
CAP_CL10_SAM [mm]
  rect 0.656x0.8 smd paste+0 mask+0: 1(-0.828,0) 2(0.828,0)
  silkscreen extent -0.19,-0.53 0.19,0.53, body extent -0.8,-0.4 0.8,0.4, height 0.9
CAPC0402(1005)60_L [mm] "Chip Capacitor, Body 1.0x0.5mm, Height 0.6mm, IPC High Density"
  rrect25% 0.5x0.55 smd: 1(-0.45,0) 2(0.45,0)
  silkscreen extent 0,-0.2 0,0.2, body extent -0.5,-0.25 0.5,0.25, height 0.6
CAPC0603(1608)100_L [mm] "Chip Capacitor, Body 1.6x0.8mm, Height 1.0mm, IPC High Density"
  rrect25% 0.66x0.76 smd: 1(-0.7,0) 2(0.7,0)
  silkscreen extent 0,-0.3 0,0.3, body extent -0.8,-0.4 0.8,0.4, height 0.95
CAPC0805(2012)145_L [mm] "Chip Capacitor, Body 2.0x1.2mm, Height 1.45mm, IPC High Density"
  rrect25% 0.76x1.3 smd: 1(-0.9,0) 2(0.89,0)
  silkscreen extent -0.3,-0.55 0.3,0.55, body extent -1,-0.6 1,0.6, height 1.45
CAPC1608X90X40NL10T20 [mm] "Chip Capacitor, 2-Leads, Body 1.70x0.90mm, IPC Medium Density"
  rect 0.95x0.95 smd: 1(-0.625,0) 2(0.625,0)
  body extent -0.85,-0.45 0.85,0.45, height 0.9
CAPC1709X04N [mm] "Chip Capacitor, 2-Leads, Body 1.70x0.90mm, IPC Medium Density"
  rect 0.8x1.05 smd: 1(-0.875,0) 2(0.875,0)
  silkscreen extent -0.1,-0.43 0.1,0.43, body extent -0.9,-0.5 0.9,0.5, height 0.45
CAPC2012X145N [mm]
  rrect25% 1.11x1.47 smd: 1(-0.9,0) 2(0.9,0)
  body extent -1,-0.63 1,0.63, height 1.45
CONN11_BM11B-GHS-TBTLFSNN_JST [mm]
  rect 0.65x1.7 smd paste+0 mask+0: 1(-6.25,-2.379) 2(-5,-2.379) 3(-3.75,-2.379) 4(-2.5,-2.379) 5(-1.25,-2.379) 6(0,-2.379) 7(1.25,-2.379) 8(2.5,-2.379) 9(3.75,-2.379) 10(5,-2.379) 11(6.25,-2.379)
  rect 1.1x2.9 smd paste-1.45 mask-1.448: 12(-8.1,0.971) 13(8.1,0.971)
  silkscreen extent -8.62,-2.25 8.62,2.25
DIOM7959X262N [mm]
  rrect25% 2.18x3.12 smd: A(3.485,0) C(-3.485,0)
  silkscreen extent -3.43,-2.95 3.43,2.95, body extent -3.97,-2.95 3.97,2.95, height 2.62
FP-B02B-XASK-1-A_LF_SN-MFG [mm]
  rect 1.4x1.4 hole 0.9 paste-2539.97 mask+0: 1(1.25,0)
  round 1.4 hole 0.9 paste-2539.97 mask+0: 2(-1.25,0)
  round 1.2 hole 1.2 unplated paste-2539.97 mask+0: ""(2.85,1.6)
  silkscreen extent -3.75,-3.2 4.37,3.2, body extent -3.75,-3.2 3.75,3.2, height 8.8
FP-D0008A-IPC_B [mm]
  rect 2.169x0.582 smd paste+0 mask+0: 1(-2.364,1.905)
  rrect100% 2.169x0.582 smd paste+0 mask+0: 2(-2.364,0.635) 3(-2.364,-0.635) 4(-2.364,-1.905) 5(2.364,-1.905) 6(2.364,-0.635) 7(2.364,0.635) 8(2.364,1.905)
  silkscreen extent -4.12,-2.45 0.78,2.45, body extent -3,-2.45 3,2.45, height 1.75
FUSE-SMD_L12.5-W4.5 [mm]
  rect 3.8x5.6 smd paste+0 mask+0.05: 1(-4.76,0) 2(4.76,0)
  silkscreen extent -2.63,-2.29 2.63,2.29
INDC2520X100N [mm]
  rect 1.24x2.22 smd: 1(-1.09,0) 2(1.09,0)
  silkscreen extent -0.15,-1.1 0.15,1.1, body extent -1.25,-1 1.25,1, height 1
JST-BM02B-GHS-TBT_V [mm] "Connector, 2-Leads, Body 5.75x4.25mm, Pitch 1.25mm"
  rrect30% 0.6x1.7 smd: 1(-0.625,-1.675) 2(0.625,-1.675)
  rrect20% 1x2.8 smd: MP1(-2.475,1.675) MP2(2.475,1.675)
  silkscreen extent -2.88,-2.31 2.88,2.78, body extent -2.88,-2.18 2.87,2.77, height 4.21
LED_LTST-C194K-0603_1P6X0P8X0P3_LTO [mil]
  rect 30x35 smd paste+0 mask+0: 1(-32.5,0) 2(32.5,0)
  silkscreen extent -5,-22 5,22, body extent -34,-17 34,17, height 14
LQFP64-10x10mm [mil]
  rect 47x12 smd paste+0 mask+0: 1(-226.38,147.64) 2(-226.38,127.95) 3(-226.38,108.27) 4(-226.38,88.58) 5(-226.38,68.9) 6(-226.38,49.21) 7(-226.38,29.53) 8(-226.38,9.84) 9(-226.38,-9.84) 10(-226.38,-29.53) 11(-226.38,-49.21) 12(-226.38,-68.9) 13(-226.38,-88.58) 14(-226.38,-108.27) 15(-226.38,-127.95) 16(-226.38,-147.64) 33(226.38,-147.64) 34(226.38,-127.95) 35(226.38,-108.27) 36(226.38,-88.58) 37(226.38,-68.9) 38(226.38,-49.21) 39(226.38,-29.53) 40(226.38,-9.84) 41(226.38,9.84) 42(226.38,29.53) 43(226.38,49.21) 44(226.38,68.9) 45(226.38,88.58) 46(226.38,108.27) 47(226.38,127.95) 48(226.38,147.64)
  rect 12x47 smd paste+0 mask+0: 17(-147.64,-226.38) 18(-127.95,-226.38) 19(-108.27,-226.38) 20(-88.58,-226.38) 21(-68.9,-226.38) 22(-49.21,-226.38) 23(-29.53,-226.38) 24(-9.84,-226.38) 25(9.84,-226.38) 26(29.53,-226.38) 27(49.21,-226.38) 28(68.9,-226.38) 29(88.58,-226.38) 30(108.27,-226.38) 31(127.95,-226.38) 32(147.64,-226.38) 49(147.64,226.38) 50(127.95,226.38) 51(108.27,226.38) 52(88.58,226.38) 53(68.9,226.38) 54(49.21,226.38) 55(29.53,226.38) 56(9.84,226.38) 57(-9.84,226.38) 58(-29.53,226.38) 59(-49.21,226.38) 60(-68.9,226.38) 61(-88.58,226.38) 62(-108.27,226.38) 63(-127.95,226.38) 64(-147.64,226.38)
  silkscreen extent -273,-270 270,270, body extent -236,-236 236,236, height 63
LTV-817S_LTO [mil]
  rect 77x53 smd paste+0 mask+0: 1(-181.5,50) 2(-181.5,-50) 3(181.5,-50) 4(181.5,50)
  silkscreen extent -143,-105 143,106, body extent -206,-101 206,101, height 181
MBRD660CTT4G [mm]
  rect 1.6x3 smd: 1(-2.285,-4.39) 3(2.285,-4.39)
  rect 5.8x6.2 smd: 2(0,2.79)
  silkscreen extent -3.27,-6.4 3.27,4.81, body extent -3.37,-5.71 3.37,5.97, height 2.39
RESC0402(1005)_L [mm] "Chip Resistor, Body 1.0x0.5mm, IPC High Density"
  rrect25% 0.5x0.55 smd: 1(-0.45,0) 2(0.45,0)
  silkscreen extent 0,-0.2 0,0.2, body extent -0.5,-0.25 0.5,0.25, height 0.3
RESC0603(1608)_L [mm] "Chip Resistor, Body 1.6x0.8mm, IPC High Density"
  rrect25% 0.66x0.76 smd: 1(-0.7,0) 2(0.7,0)
  silkscreen extent 0,-0.3 0,0.3, body extent -0.8,-0.4 0.8,0.4, height 0.45
RESC0805(2012)_L [mm] "Chip Resistor, Body 2.0x1.3mm, IPC High Density"
  rrect25% 0.76x1.3 smd: 1(-0.9,0) 2(0.89,0)
  silkscreen extent -0.3,-0.55 0.3,0.55, body extent -1,-0.62 1,0.63, height 0.6
RESC1632X70N [mm]
  rect 1.01x3.42 smd: 1(-0.753,0) 2(0.753,0)
  body extent -0.8,-1.6 0.8,1.6, height 0.7
RESC1709X04N [mm] "Chip Resistor, 2-Leads, Body 1.70x0.90mm, IPC Medium Density"
  rect 0.75x1 smd: 1(-0.875,0) 2(0.875,0)
  silkscreen extent -0.1,-0.4 0.1,0.4, body extent -0.9,-0.5 0.9,0.5, height 0.45
RESC6331X75N [mm]
  rect 1.26x3.32 smd: 1(-2.975,0) 2(2.975,0)
  silkscreen extent -2.02,-1.65 2.02,1.65, body extent -3.15,-1.55 3.15,1.55, height 0.75
SMT_MOB4SI_YXC [mil]
  rect 54.78x37 smd paste+0 mask+0: 1(-51.39,-32.48) 2(51.39,-32.48) 3(51.39,32.48) 4(-51.39,32.48)
  silkscreen extent -115,-56 12,56, body extent -65,-52 65,52, height 32
SOIC_05WU-7_DIO [mil]
  rect 35.5x20 smd paste+0 mask+0: 1(-51.25,37.4) 2(-51.25,0) 3(-51.25,-37.4) 4(51.25,-37.4) 5(51.25,0) 6(51.25,37.4)
  silkscreen extent -38,-64 39,64, body extent -55,-59 55,59, height 39
SOP50P490X110-10N [mm]
  rrect18% 1.47x0.28 smd: 1(-2.15,1) 2(-2.15,0.5) 3(-2.15,0) 4(-2.15,-0.5) 5(-2.15,-1) 6(2.15,-1) 7(2.15,-0.5) 8(2.15,0) 9(2.15,0.5) 10(2.15,1)
  silkscreen extent -3.72,-1.5 1.5,1.5, body extent -2.45,-1.5 2.45,1.5, height 1.1
SOP65P640X120-14N [mm]
  rrect25% 1.57x0.41 smd: 1(-2.87,1.95) 2(-2.87,1.3) 3(-2.87,0.65) 4(-2.87,0) 5(-2.87,-0.65) 6(-2.87,-1.3) 7(-2.87,-1.95) 8(2.87,-1.95) 9(2.87,-1.3) 10(2.87,-0.65) 11(2.87,0) 12(2.87,0.65) 13(2.87,1.3) 14(2.87,1.95)
  silkscreen extent -4.34,-2.5 2.2,2.5, body extent -3.2,-2.5 3.2,2.5, height 1.2
SOP65P640X120-16N [mm]
  rrect25% 1.57x0.41 smd: 1(-2.87,2.275) 2(-2.87,1.625) 3(-2.87,0.975) 4(-2.87,0.325) 5(-2.87,-0.325) 6(-2.87,-0.975) 7(-2.87,-1.625) 8(-2.87,-2.275) 9(2.87,-2.275) 10(2.87,-1.625) 11(2.87,-0.975) 12(2.87,-0.325) 13(2.87,0.325) 14(2.87,0.975) 15(2.87,1.625) 16(2.87,2.275)
  silkscreen extent -4.29,-2.5 1.77,2.5, body extent -3.2,-2.5 3.2,2.5, height 1.2
SOT23-3_SM24CANB-02HTG_LTF [mil]
  rect 22x49 smd paste+0 mask+0: 1(-37.5,-41.5) 2(37.5,-41.5) 3(0,41.5)
  silkscreen extent -65,-99 65,33, body extent -60,-52 60,52, height 44
SOT65P210X110-3N [mm]
  rect 0.97x0.5 smd: 1(-0.98,0.65) 2(-0.98,-0.65) 3(0.98,0)
  silkscreen extent -2.18,-1.1 0.68,1.1, body extent -1.05,-1.07 1.05,1.07, height 1.1
SOT95P280X145-5N [mm]
  rrect50% 1.21x0.59 smd: 1(-1.255,0.95) 2(-1.255,0) 3(-1.255,-0.95) 4(1.255,-0.95) 5(1.255,0.95)
  silkscreen extent -2.51,-1.45 0.8,1.45, body extent -1.4,-1.45 1.4,1.45, height 1.45
SW_TS-1088R-02026_XNP [mil]
  rect 41x79 smd paste+0 mask+0: 1(-87.6,0) 2(87.6,0)
  silkscreen extent -208,-64 83,63
TO255P460X1020X2008-3P [mm]
  rect 1.98x1.98 / inner round 1.98 / far side rect 1.98x1.98 hole 1.32: 1(0,0)
  rect 10.18x13 smd: 2(2.55,12.7)
  round 1.98 hole 1.32: 2(2.55,0) 3(5.1,0)
  silkscreen extent -2.65,-1.53 7.75,3.07, body extent -2.55,-1.53 7.65,3.07, height 19.21
VREG_TPS79625KTTR [mm]
  rect 3.4x1 smd paste-3 mask+0: 1(-10.6,3.4) 2(-10.6,1.7) 3(-10.6,0) 4(-10.6,-1.7) 5(-10.6,-3.4)
  rect 8.6x10.7 smd paste-6 mask+0: 6(0,0)
  silkscreen extent -13.3,-5.08 -4.62,5.08, body extent -11.11,-5.08 3.24,5.08, height 4.65
WCAP-ASLI_D8H10.5 [mm] "Aluminium Electrolytic V-Chip SMT Capacitors, 8x10.5mm"
  rect 4.2x1.9 smd: 1(3.5,0) 2(-3.5,0)
  silkscreen extent -4.25,-4.25 4.25,4.25, body extent -4.5,-4.15 4.5,4.15, height 10.5
WCAP-ASLI_D10H10.5 [mm] "Aluminium Electrolytic V-Chip SMT Capacitors, 10x10.5mm"
  rect 4.4x1.9 smd: 1(4.35,0) 2(-4.35,0)
  silkscreen extent -5.25,-5.25 5.25,5.25, body extent -5.5,-5.15 5.5,5.15, height 10.5
WE-PD_1210 [mm] "SMT Shielded Power Inductor, 2-leads, body 12x12mm"
  rect 5.4x2.9 smd: 1(0,-4.95) 2(0,4.95)
  PWR keep-out region: -6,6 -2.9,6 -2.9,3.3 2.9,3.3 2.9,6 6,6 6,-6 2.9,-6 2.9,-3.3 -2.9,-3.3 -2.9,-6 -6,-6
  silkscreen extent -6.25,-7.02 6.25,6.25, body extent -6,-6 6,6, height 9.46
XTAL_7X-TR_ECS [mm]
  rect 1.239x0.558 smd paste+0 mask+0: 1(-1.635,2.75) 2(-1.635,-2.75) 3(1.635,-2.75) 4(1.635,2.75)
  silkscreen extent -2.03,-4.13 2.03,4.13, body extent -1.91,-4 1.91,4, height 2.49

## Part data
C1: library part CMP-001-00076-4, "Chip Capacitor, 4.7µF +/-20%, 10V, 0603, Thickness 1 mm", Case/Package=0603, Max Operating Temperature=85°C, Min Operating Temperature=-55°C, Tolerance=10%, Voltage Rating=10V, Mounting Technology=SMT, Pins=2
C2 C3 C4 C5 C13 C15 C26: library part CMP-001-00067-3, "Chip Capacitor, 100nF +/-20%, 50V, 0402, Thickness 0.6 mm", Case/Package=0402, Max Operating Temperature=85°C, Min Operating Temperature=-55°C, Tolerance=10%, Voltage Rating=50V, Mounting Technology=SMT, Pins=2
C6 C31 C32 C33 C34: library part CMP-001-00069-3, "Chip Capacitor, 10nF +/-20%, 50V, 0402, Thickness 0.6 mm", Case/Package=0402, Max Operating Temperature=85°C, Min Operating Temperature=-55°C, Tolerance=5%, Voltage Rating=50V, Mounting Technology=SMT, Pins=2
C7 C8: library part CMP-001-00078-4, "Chip Capacitor, 1µF +/-40%, 50V, 0603, Thickness 1 mm", Case/Package=0603, Max Operating Temperature=85°C, Min Operating Temperature=-55°C, Tolerance=10%, Voltage Rating=50V, Mounting Technology=SMT, Pins=2
C9 C10: library part CMP-001-00085-2, "Ceramic Capacitor, Multilayer, Ceramic, 50V, 4.17% +Tol, 4.17% -Tol, C0G, -/+30ppm/Cel TC, 0.000006uF, Surface Mount, 0603", Capacitor Type=Ceramic, Case/Package=0603, Max Operating Temperature=125°C, Min Operating Temperature=-55°C, Mounting Technology="Surface Mount", Pins=2, RoHS Compliant=Yes
C11 C12: library part CMP-001-00087-3, "Multilayer Ceramic Capacitor, 16 pF, 50 V, ± 5%, C0G (NP0), 0603 [1608 Metric]"
C14 C25: library part CMP-001-00079-4, "Chip Capacitor, 10µF +/-20%, 25V, 0805, Thickness 1.45 mm", Case/Package=0805, Max Operating Temperature=85°C, Min Operating Temperature=-55°C, Tolerance=10%, Voltage Rating=50V, Mounting Technology=SMT, Pins=2
C16: library part CMP-001-00083-3, "Ceramic Capacitor, Multilayer, Ceramic, 50V, 10% +Tol, 10% -Tol, X7R, 15% TC, 0.0047uF, Surface Mount, 0603", Capacitor Type=Ceramic, Case/Package=0603, Max Operating Temperature=125°C, Min Operating Temperature=-55°C, Voltage Rating=50V, Mounting Technology="Surface Mount", Pins=2, RoHS Compliant=Yes
C17 C18 C19 C20 C21 C22: library part CMP-001-00017-6, "Chip Capacitor, 100 nF, +/- 10%, 50 V, 0603 (1608 Metric)", Capacitor Type=Ceramic, Case/Package=0603, Max Operating Temperature=125°C, Min Operating Temperature=-55°C, Tolerance=10%, Voltage Rating=100V, Mounting Technology=SM, Pins=2, RoHS Compliant=True
C23: library part CMP-001-00091-1, "WCAP-ASLI Aluminum Electrolytic Capacitor, V-Chip, D10 x H10.5mm, 100uF, 63V", Capacitance Tolerance=+/-20%, Leakage Current=63uA, Manufacturer="Wurth Elektronik", Operating Temperature Max=105°C, Operating Temperature Min=-55°C, Rated Voltage (DC)=63V, Ripple Current=280mA, Category="Aluminum Electrolytic Capacitors", ComponentLink1Description="Website Link", ComponentLink1URL=https://www.we-online.com/redexpert/article/865080757014?ad, ComponentLink2Description="Datasheet Link", ComponentLink2URL=https://www.we-online.com/redexpert/spec/865080757014?ad, Design Item ID=865080757014, Diameter=10mm, Dissipation Factor=12%, Endurance=2000h, Height=10.5mm, Manufacturer Part Number=865080757014, Match Code=WCAP-ASLI, Mount="Surface Mount", Packaging="Tape and Reel", Source=WCAP-ASLI.SchLib, Technical Reference=ASEF105101M063DVCTEB000
C24: library part CMP-001-00090-1, "WCAP-ASLI Aluminum Electrolytic Capacitor, V-Chip, D8 x H10.5mm, 220uF, 35V", Capacitance Tolerance=+/-20%, Leakage Current=77uA, Manufacturer="Wurth Elektronik", Operating Temperature Max=105°C, Operating Temperature Min=-55°C, Rated Voltage (DC)=35V, Ripple Current=570mA, Category="Aluminum Electrolytic Capacitors", ComponentLink1Description="Website Link", ComponentLink1URL=https://www.we-online.com/redexpert/article/865080553014?ad, ComponentLink2Description="Datasheet Link", ComponentLink2URL=https://www.we-online.com/redexpert/spec/865080553014?ad, Design Item ID=865080553014, Diameter=8mm, Dissipation Factor=14%, Endurance=2000h, Height=10.5mm, Manufacturer Part Number=865080553014, Match Code=WCAP-ASLI, Mount="Surface Mount", Packaging="Tape and Reel", Source=WCAP-ASLI.SchLib, Technical Reference=ASEE105221M035DVCTEB000
C27 C28: library part CMP-001-00092-3, Case/Package=None, Voltage Rating=25V, Availability=Unavailable, Design Item ID=CL21A226MAYNNNE, MF="{'manufacturer': u'Samsung Electro-Mechanics'}", MP=CL21A226MAYNNNE, Price=None, Source=CL21A226MAYNNNE.SchLib
C29 C30: library part CMP-001-00095-3, "No Description Available", Manufacturer_Name=Samsung, Voltage Rating=10V, Copyright="Copyright (C) 2025 Ultra Librarian. All rights reserved.", Design Item ID=CL10B105KP8NNNC, Manufacturer_Part_Number=CL10B105KP8NNNC, Source=CL10B105KP8NNNC.SchLib
C35 C36: library part CMP-001-00082-4, "Chip Capacitor, 47µF +/-40%, 6.3V, 0805, Thickness 1.45 mm", Case/Package=0805, Max Operating Temperature=85°C, Min Operating Temperature=-55°C, Tolerance=10%, Voltage Rating=100V, Mounting Technology=SMT, Pins=2
D1: library part CMP-054-000000-3, "No Description Available", Manufacturer_Name="Littelfuse Inc", Copyright="Copyright (C) 2025 Ultra Librarian. All rights reserved.", Design Item ID=SM24CANB-02HTG, Manufacturer_Part_Number=SM24CANB-02HTG, RefDes=RefDes, Source=SM24CANB-02HTG.SchLib, Type=Type
D2: library part CMP-004-00031-3, "Rectifier Diode, Schottky, 1 Phase, 2 Element, 3A, 60V V(RRM), Silicon", Case/Package="DPAK3 6.10x6.54x2.28, 2.29P", Forward Current=3A, Forward Voltage=650mV, Manufacturer_Name=onsemi, Max Operating Temperature=175°C, Min Operating Temperature=-65°C, Peak Inverse Voltage=60V, Datasheet Link=https://www.onsemi.com/pub/Collateral/MBRD620CT-D.PDF, Design Item ID=MBRD660CTT4G, Geometry.Height=2.51mm, Manufacturer_Part_Number=MBRD660CTT4G, Mouser Price/Stock=https://www.mouser.co.uk/ProductDetail/onsemi/MBRD660CTT4G?qs=3JMERSakebo2QxKE182ubQ%3D%3D, Pins=2, RoHS Compliant=Yes, Source=MBRD660CTT4G.SchLib
D3 D4: library part CMP-004-00034-2, "8.0SMDJ43CA-T7, Uni-Directional TVS Diode, 8000W, 2-Pin DO-214AB", Case/Package="DO-214 Littelfuse Inc.", Check_prices=https://www.snapeda.com/parts/SMCJ48A/Littelfuse/view-part/?ref=eda, Design Item ID=8.0SMDJ43CA-T7, MF="Littelfuse Inc.", MP=SMCJ48A, SnapEDA_Link=https://www.snapeda.com/parts/SMCJ48A/Littelfuse/view-part/?ref=snap, Source=8.0SMDJ43CA-T7.SchLib
F1: library part CMP-005-00013-2, Current Rating=80A, JLCPCB Part Class="Extended Part", LCSC Part Name=一次性熔断保险丝, Manufacturer=JDTfuse(集电通), Manufacturer Part=JFC1245-2800FS, Operating Temperature=-55℃~+125℃, Voltage Rating (AC)=600V, Voltage Rating (DC)=250V, Add into BOM=yes, Convert to PCB=yes, Datasheet=https://atta.szlcsc.com/upload/public/pdf/source/20250508/CF412184D6CDD19FE95AA7AB21E198C3.pdf, Design Item ID=JFC1245-2800FS, Device=JFC1245-2800FS, Length=12.45mm, Melting I2t=5270, Source=JFC1245-2800FS1_JFC1245-2800FS.SCHLIB, Supplier Footprint=SMD,12.5x4.5mm, Supplier Part=C48783191, Symbol=JFC1245-2800FS, Type="Surface Mount Fuse", Width=4.5mm
J1 J2 J3 J4: library part CMP-011-000000-3, "Power connector; 65A; PIN: 2; Colour: yellow", Package=None, Availability="Not in stock", Check_prices=https://www.snapeda.com/parts/XT60%20YELLOW/Pololu/view-part/?ref=eda, Component Type=Standard, Design Item ID=XT60_YELLOW, MF=Pololu, MP="XT60 YELLOW", Pin Count=2, Price=None, SnapEDA_Link=https://www.snapeda.com/parts/XT60%20YELLOW/Pololu/view-part/?ref=snap, Source=XT60_YELLOW.SchLib
J5: library part CMP-168-000000-2, "No Description Available", Manufacturer_Name=JST, Manufacturer_Part_Number=BM11B-GHS-TBT(LF)(SN)(N), Copyright="Copyright (C) 2025 Ultra Librarian. All rights reserved.", Design Item ID=BM11B-GHS-TBTLFSNN, RefDes=RefDes, Source=BM11B-GHS-TBTLFSNN.SchLib, Type=Type
J6: library part CMP-002-00073-2, "XA Series 2 Position 2.5mm Pitch Top Entry with Boss ThroughHole Shrouded Header"
J7: library part CMP-002-00076-2, "WR-PHD Pin Header, THT, Vertical, pitch 2.54mm, 2 Row, 6P", Contact Resistance=20mOhm, Manufacturer="Wurth Elektronik", Operating Temperature Max=105°C, Operating Temperature Min=-40°C, Rated Current=3A, Withstanding Voltage=500V, Working Voltage=250V, Category="Board-to-Board Connectors", Component Type=Standard, ComponentLink1Description="Website Link", ComponentLink1URL=https://www.we-online.com/redexpert/article/61300621121?ad, ComponentLink2Description="Datasheet Link", ComponentLink2URL=https://www.we-online.com/redexpert/spec/61300621121?ad, Design Item ID=61300621121, Gender="Pin Header", Manufacturer Part Number=61300621121, Match Code=WR-PHD, Mount="Through Hole", Number of Rows=2, Orientation=Vertical, Packaging=Bag, Pin Count=6, Pins=6, Pitch=2.54mm, Source=WR-PHD.SchLib
J8 J9 J10: library part CMP-002-00061-3, "Disconnectable Crimp Style Connector, Pitch 1.25 mm, 1 x 2 Position, Height 4.05 mm, -25 to 85 degC, RoHS, Tape and Reel", Case/Package="Disconnectable Crimp Style Connector, Pitch 1.25 mm, 1 x 2 Position, Height 4.05 mm", Connector Type=Header,Shrouded, Mounting Technology=SurfaceMount, Pins=4
L1: library part CMP-006-00021-1, "WE-PD SMT Power Inductor, size 1210, 820μH, 0.95A, 1000mΩ", Case/Package=1210, DC Resistance=815mΩ, DC Resistance Max=1000mΩ, Inductance=820μH, Manufacturer="Wurth Elektronik", Manufacturer Part Number=7447709821, Max Operating Temperature=125°C, Min Operating Temperature=-40°C, Rated Current=0.95A, Saturation Current=1.1A, Self Resonant Frequency=1.2MHz, Category="Power Inductors", ComponentLink1Description="Website Link", ComponentLink1URL=https://www.we-online.com/redexpert/article/7447709821?ad, ComponentLink2Description="Datasheet Link", ComponentLink2URL=https://www.we-online.com/redexpert/spec/7447709821?ad, Design Item ID=7447709821, Height=10mm, Length=12mm, Match Code=WE-PD, Mount="Surface Mount", Packaging="Tape and Reel", Source=WE-PD.SchLib, Type=Standard, Width=12mm
L2: library part CMP-006-00023-3, "Inductor with Inductance: 4.7uH Tol. +/-20%, Package: 1008 _2520_", Case/Package="2520 Murata", Availability=Unavailable, Design Item ID=LQM2HPN4R7MG0L, MF="Murata Electronics", MP=LQM2HPN4R7MG0L, Price=None, SnapEDA_Link=https://www.snapeda.com/parts/LQM2HPN4R7MG0L/Murata%20Electronics%20North%20America/view-part/210541/?ref=snap, Source=SnapEDAsch.SchLib
LED1: library part CMP-007-00036-3, "No Description Available", Manufacturer_Name=LITE-ON, Manufacturer_Part_Number=LTST-C194KGKT, Copyright="Copyright (C) 2025 Ultra Librarian. All rights reserved.", Design Item ID=LTST-C194KGKT, Source=LTST-C194KGKT.SchLib, Type="LED Indication"
Q1 Q2 Q3 Q4: library part CMP-120-000000-8, "MOSFET POWER MOSFET", Drain current continuous at Tc = 25°C=100A, Drain current continuous at Tc = 100°C=70A, Drain Source Breakdown Voltage Vds=80V, Forward On Voltage (Vgs = 0V, Isd = 100A)=1.2V, Manufacturer_Name=STMicroelectronics, Max Operating Temperature=175°C, Min Operating Temperature=-55°C, Mouser Part Number=511-STP100N8F6, Pulsed Drain Current=400A, Datasheet Link=https://www.st.com/resource/en/datasheet/stp100n8f6.pdf, Design Item ID=STP100N8F6, Geometry.Height=4.6mm, Manufacturer_Part_Number=STP100N8F6, Mouser Price/Stock=https://www.mouser.co.uk/ProductDetail/STMicroelectronics/STP100N8F6?qs=JkuGhO7zlpk0tv8q3dz9Ww%3D%3D, Nominal Vgs=3V, RtjA=62.5°C/W, RtjC=0.85°C/W, Source=STP100N8F6.SchLib, Transistor Type=MOSFET, Vgs (Max)=20V
Q5 Q6 Q7 Q8 Q9 Q15 Q16 Q17 Q18 Q19: library part CMP-147-000000-1, "P-Channel Enhancement FET SOT-323", Package="SOT-323 Diodes Inc.", Check_prices=https://www.snapeda.com/parts/DMP2240UW-7/Diodes+Inc./view-part/?ref=eda, Component Type=Standard, Design Item ID=DMP2240UW-7, MF="Diodes Inc.", MP=DMP2240UW-7, Pin Count=3, SnapEDA_Link=https://www.snapeda.com/parts/DMP2240UW-7/Diodes+Inc./view-part/?ref=snap, Source=DMP2240UW-7.SchLib
Q10 Q11 Q12 Q13 Q14 Q20 Q21 Q22 Q23 Q24: library part CMP-143-000000-2, "No Description Available", Manufacturer_Name=LITE-ON, Copyright="Copyright (C) 2025 Ultra Librarian. All rights reserved.", Design Item ID=LTV-817S-TA1, Manufacturer_Part_Number=LTV-817S-TA1, RefDes=RefDes, Source=LTV-817S-TA1.SchLib, Type=Type
R1 R2: library part CMP-009-00177-3, "Fixed Resistor, Metal Glaze/thick Film, 0.1W, 60.4ohm, 75V, 1% +/-Tol, 100ppm/Cel, Surface Mount, 0603", Case/Package=0603, Max Operating Temperature=155°C, Min Operating Temperature=-55°C, Power=100mW, Tolerance=1%, Mounting Technology="Surface Mount", Pins=2, RoHS Compliant=Yes
R3 R4 R5 R6 R7 R8 R9 R10 R11 R12 R13 R14 R15 R16 R17 R18 R19 R20 R21 R22 R26 R27 R28 R29 R30 R31 R32 R33 R34 R35 R43 R44 R45 R46 R110: library part CMP-009-00065-4, "100R 0.063W 1% 0402 (1005 Metric)  SMD", Case/Package=0402, Power=63mW, Tolerance=1%, Voltage Rating=50V, Mounting Technology=SMT, Pins=2
R23 R24 R25 R51 R52 R53 R54 R67 R68 R69 R85 R86 R87 R88 R89 R90 R91 R92 R93 R94: library part CMP-009-00178-3, "750 mOhms Â±1% 1W Chip Resistor 0612 (1632 Metric) Automotive AEC-Q200, Current Sense, Moisture Resistant Thick Film", Case/Package="1632 Vishay", Power=750mW, Check_prices=https://www.snapeda.com/parts/RCWE0612R750FKEA/Vishay+Dale/view-part/?ref=eda, Design Item ID=RCWE0612R750FKEA, MF="Vishay Dale", MP=RCWE0612R750FKEA, SnapEDA_Link=https://www.snapeda.com/parts/RCWE0612R750FKEA/Vishay+Dale/view-part/?ref=snap, Source=RCWE0612R750FKEA.SchLib
R36 R37 R39 R40 R41 R42: library part CMP-009-00118-3, "Chip Resistor, 1 kOhms, +/-5%, 125 mW, -55 to 155 degC, 0805", Case/Package=0805, Max Operating Temperature=155°C, Min Operating Temperature=-55°C, Power=125mW, Tolerance=5%, Voltage Rating=100V, Pins=2
R38: library part CMP-009-00065-4, "100R 0.063W 1% 0402 (1005 Metric)  SMD", Case/Package=0402, Power=100mW, Tolerance=1%, Voltage Rating=100V, Mounting Technology=SMT, Pins=2
R47 R48 R49 R50: library part CMP-009-00069-2, "120R 0.1W 5% 0603 (1608 Metric)  SMD", Case/Package=0603, Power=100mW, Tolerance=5%, Voltage Rating=75V, Mounting Technology=SMT, Pins=2
R55: library part CMP-009-00180-1, "0 Ohms Jumper 1W Chip Resistor 2512 (6432 Metric) - Thick Film", Case/Package="6331 Bourns", Power=3W, Check_prices=https://www.snapeda.com/parts/CR2512-J/-000ELF/Bourns/view-part/?ref=eda, Design Item ID=CR2512-J/-000ELF, MF=Bourns, MP=CR2512-J/-000ELF, SnapEDA_Link=https://www.snapeda.com/parts/CR2512-J/-000ELF/Bourns/view-part/?ref=snap, Source=CR2512-J_-000ELF.SchLib
R56 R57: library part CMP-009-00180-1, Case/Package="6331 Bourns", Power=3W, Check_prices=https://www.snapeda.com/parts/CR2512-J/-000ELF/Bourns/view-part/?ref=eda, Design Item ID=CR2512-J/-000ELF, MF=Bourns, MP=CR2512-J/-000ELF, SnapEDA_Link=https://www.snapeda.com/parts/CR2512-J/-000ELF/Bourns/view-part/?ref=snap, Source=CR2512-J_-000ELF.SchLib
R58 R59 R64 R65 R66 R75 R76 R77 R78 R79 R80 R81 R82 R83 R84 R100 R101 R102 R103 R104 R105 R106 R107 R108 R109: library part CMP-009-00065-4, "100R 0.063W 1% 0402 (1005 Metric)  SMD", Case/Package=0402, Power=63mW, Tolerance=1%, Mounting Technology=SMT, Pins=2
R70 R71 R72 R73 R74 R95 R96 R97 R98 R99: library part CMP-009-00064-2, "100K 0.063W 1% 0402 (1005 Metric)  SMD", Case/Package=0402, Power=63mW, Tolerance=1%, Mounting Technology=SMT, Pins=2
SW1: library part CMP-011-00013-1, "No Description Available", Manufacturer_Name=Xunpu, Copyright="Copyright (C) 2025 Ultra Librarian. All rights reserved.", Design Item ID=TS-1088R-02026, Manufacturer_Part_Number=TS-1088R-02026, Source=TS-1088R-02026.SchLib, Type="Tactile Switches"
U1: library part CMP-031-00008-2, "Ultra-low-power with FPU Arm Cortex-M4 MCU 80 MHz with 256 Kbytes of Flash memory, USB OTG, DFSDM", Manufacturer_Name=STMicroelectronics, Copyright="Copyright (C) 2025 Ultra Librarian. All rights reserved.", Datasheet=https://www.st.com/resource/en/datasheet/stm32l475rc.pdf, Design Item ID=STM32L475RCT6, Manufacturer_Part_Number=STM32L475RCT6, RefDes=RefDes, RoHS Compliant=Yes, Source=STM32L475RCT6.SchLib, Type=Type
U2: library part CMP-015-00009-1, "Interface Circuit, PDSO8", Case/Package=SOP, Max Operating Temperature=125°C, Min Operating Temperature=-40°C, Nominal Supply Voltage=3.3V, Pins=8, RoHS Compliant=Yes
U3 U4 U5: library part CMP-014-00002-2, "Quad, 5.5-V, 1-MHz, RRO operational amplifier", Average Bias Current-Max (IIB)=250nA, Case/Package=TSSOP, Frequency Compensation=YES, Input Offset Voltage-Max=7mV, Max Operating Temperature=125°C, Max Supply Current=1.16mA, Min Operating Temperature=-40°C, Nominal Supply Voltage=2.7V, Peak Reflow Temperature (Cel)=260°C, Power Supplies=3/5V, Supply Voltage Limit-Max=5.5V, Temperature Grade=AUTOMOTIVE, Voltage Gain-Min=10000, Amplifier Type="OPERATIONAL AMPLIFIER", Architecture=VOLTAGE-FEEDBACK, Bias Current-Max (IIB) @25C=250nA, Channels=4, Check_prices=https://www.snapeda.com/parts/LMV324IPWR/Texas+Instruments/view-part/?ref=eda, Common-mode Reject Ratio-Nom=65dB, Component Type=Standard, Design Item ID=LMV324IPWR, Height - Seated (Max)=1.2mm, Length=5mm, MF="Texas Instruments", MP=LMV324IPWR, Pins=14, RoHS Compliant=Yes, Slew Rate=1V/µs, SnapEDA_Link=https://www.snapeda.com/parts/LMV324IPWR/Texas+Instruments/view-part/?ref=snap, Source=LMV324IPWR.SchLib, Surface Mount=Yes, Unity Gain BW-Nom=1MHz, Width=4.4mm
U7 U8 U9: library part CMP-127-000000-1, "85-V, 16-bit, I2C output current/voltage/power monitor with alert", Package="VSSOP-10 Texas Instruments", Check_prices=https://www.snapeda.com/parts/INA237AIDGSR/Texas+Instruments/view-part/?ref=eda, Component Type=Standard, Design Item ID=INA237AIDGSR, MF="Texas Instruments", MP=INA237AIDGSR, Pin Count=10, SnapEDA_Link=https://www.snapeda.com/parts/INA237AIDGSR/Texas+Instruments/view-part/?ref=snap, Source=INA237AIDGSR.SchLib
U10: library part CMP-063-000000-4, "Switching Regulator, Voltage-mode, 4A, 58kHz Switching Freq-Max, PSSO5", Case/Package=TO-263, Feedback Bias Current=500nA, Frequency=52kHz, Max frequency=63kHz, Max Operating Temperature=125°C, Max Supply Voltage=60V, Min Operating Temperature=-40°C, Min Supply Voltage=4.75V, Output Current=1A, Output Voltage=12V, Package=None, Component Type=Standard, Design Item ID=TL2575HV-12IKTTR, MP=TL2575HV-12IKTTR, Pin Count=6, Pins=5, Price=None, RoHS Compliant=Yes, Source=TL2575HV-12IKTTR.SchLib
U11: library part CMP-075-000000-2, "No Description Available", Manufacturer_Name="Diodes Inc", Copyright="Copyright (C) 2025 Ultra Librarian. All rights reserved.", Design Item ID=AP63205WU-7, Manufacturer_Part_Number=AP63205WU-7, RefDes=RefDes, Source=AP63205WU-7.SchLib, Type=Type
U12: library part CMP-089-000000-2, "1-A, low-IQ high-accuracy low-dropout (LDO) voltage regulator with enable", Package="SOT-23-5 Texas Instruments", Check_prices=https://www.snapeda.com/parts/TLV75733PDBVR/Texas+Instruments/view-part/?ref=eda, Component Type=Standard, Design Item ID=TLV75733PDBVR, MF="Texas Instruments", MP=TLV75733PDBVR, Pin Count=4, SnapEDA_Link=https://www.snapeda.com/parts/TLV75733PDBVR/Texas+Instruments/view-part/?ref=snap, Source=TLV75733PDBVR.SchLib
U13 U14: library part CMP-122-000000-1, "High-side n-channel FET driver", Package="TSSOP-16 Texas Instruments", Check_prices=https://www.snapeda.com/parts/BQ76200PWR/Texas+Instruments/view-part/?ref=eda, Component Type=Standard, Design Item ID=BQ76200PWR, MF="Texas Instruments", MP=BQ76200PWR, Pin Count=16, SnapEDA_Link=https://www.snapeda.com/parts/BQ76200PWR/Texas+Instruments/view-part/?ref=snap, Source=BQ76200PWR.SchLib